# Altium PCB 2012_CARTE_FACTORISEE.PCBDOC
Units mil, origin at the board's own origin, x right, y up, seen from the top; angles counter-clockwise.
Board outline 2405 x 3151.5 mil, 4 copper layers (1-TOP, 2-SIGNAL, 3-GND, 4-BOTTOM); 121 components, 90 nets, 581 pads, 0 vias.
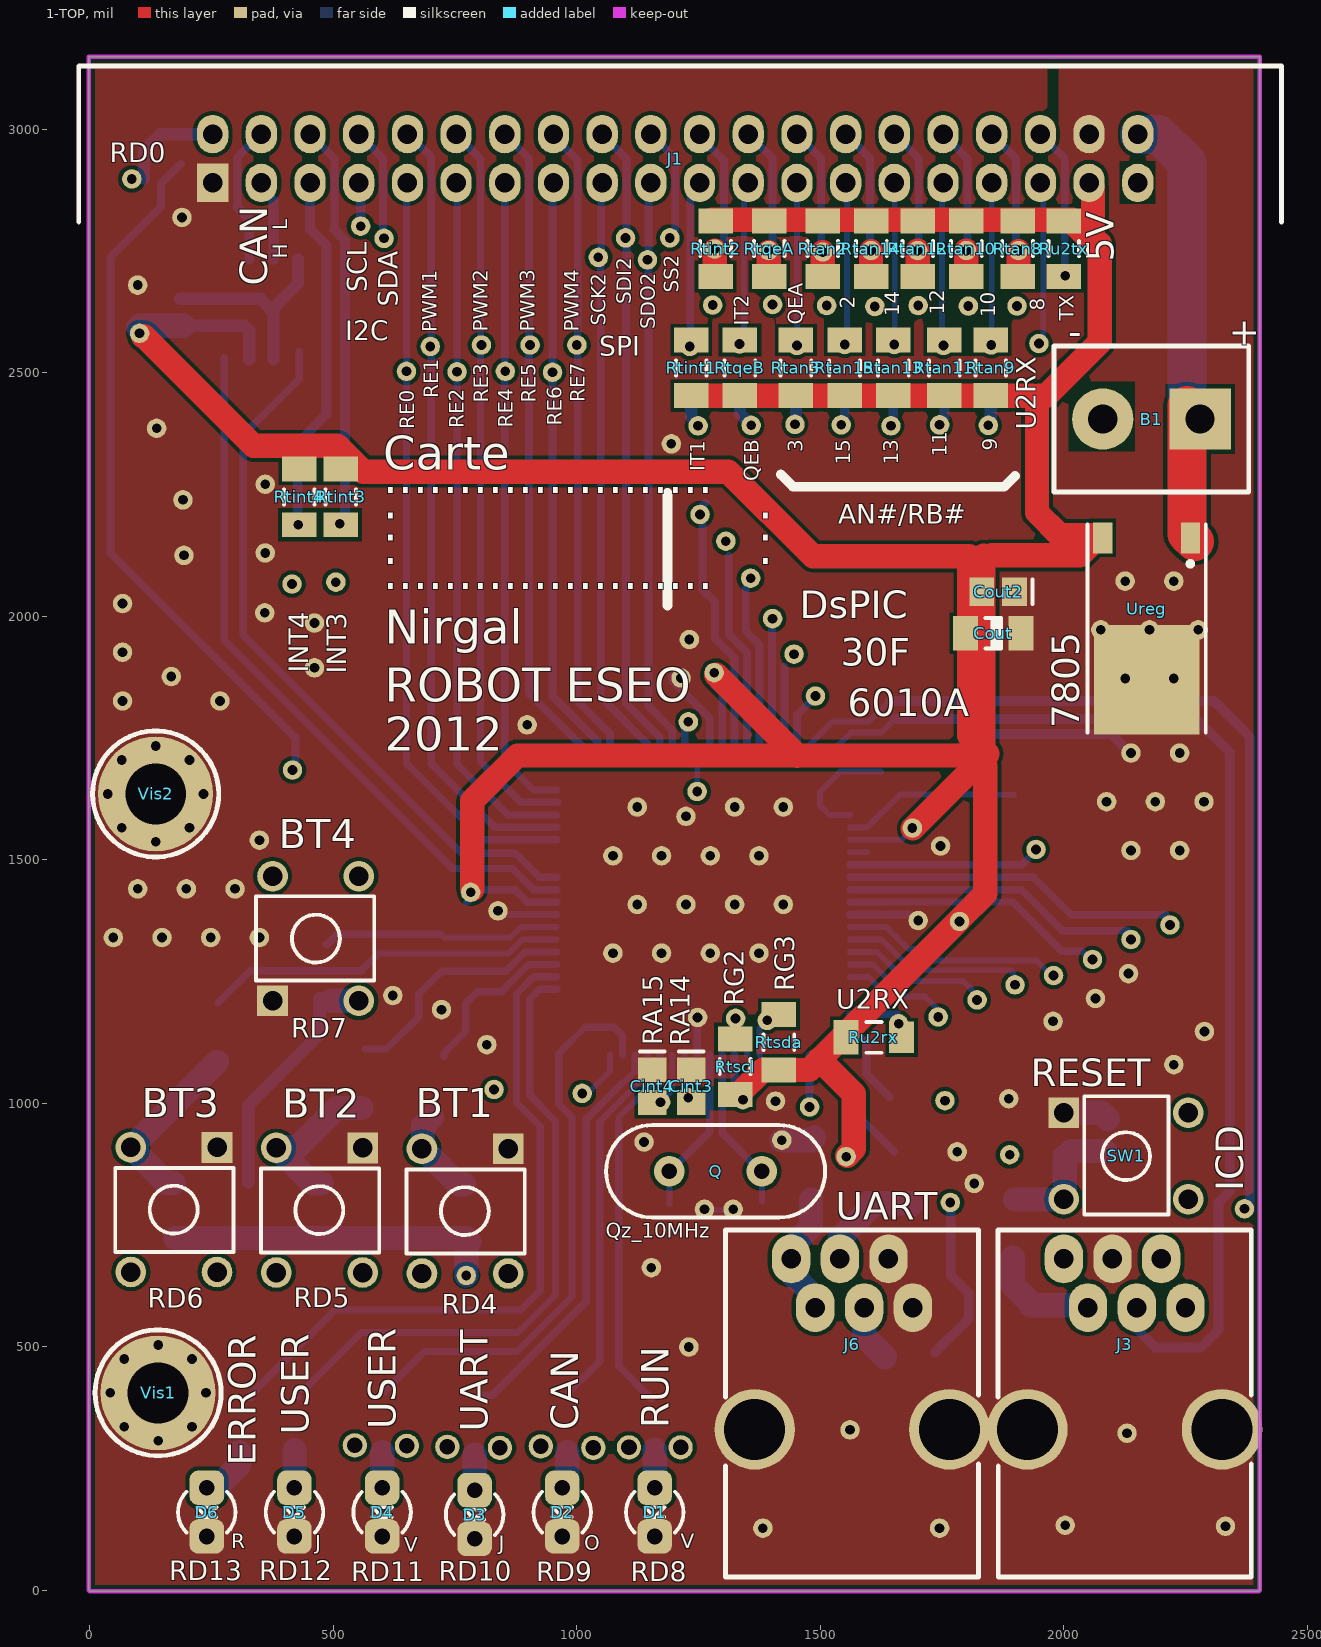
[diagram p0: 1-TOP view]
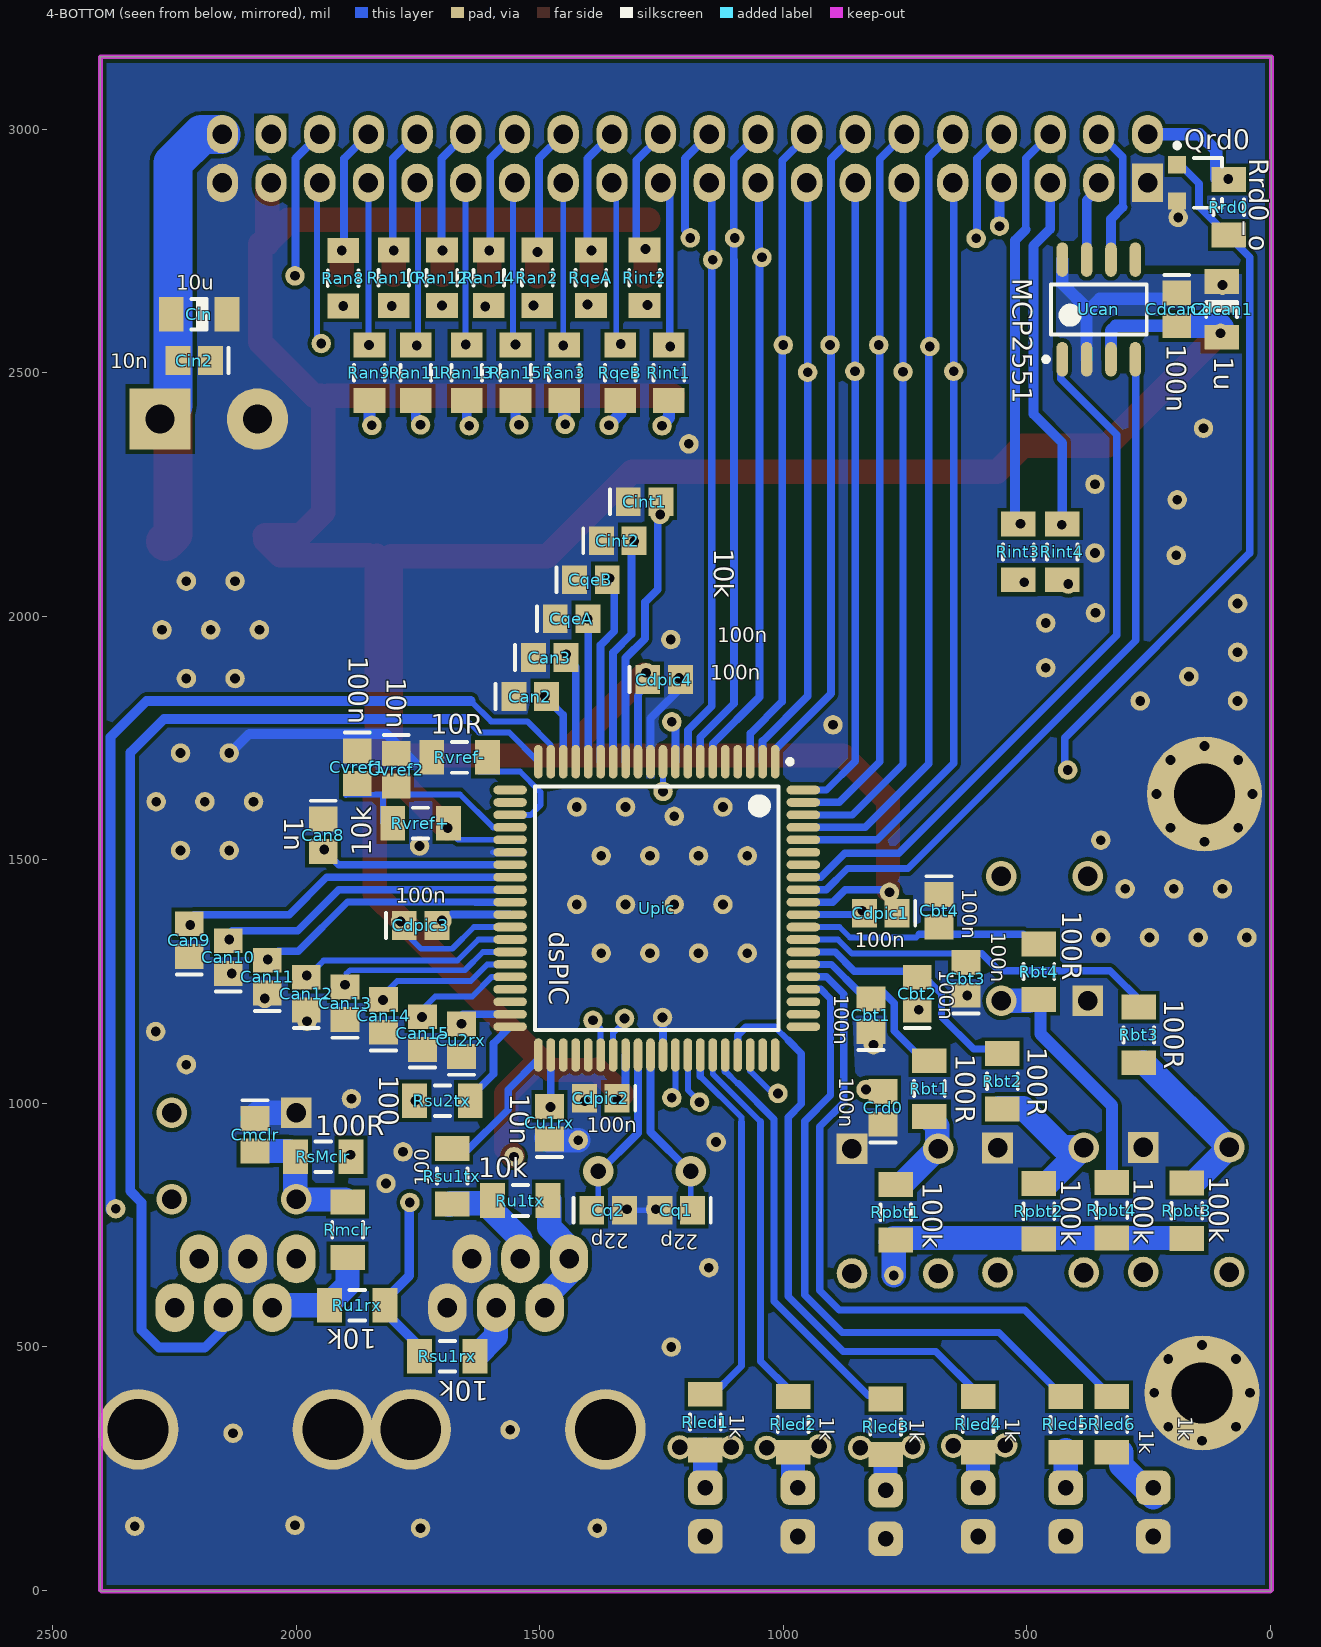
[diagram p1: 4-BOTTOM view, seen from below]
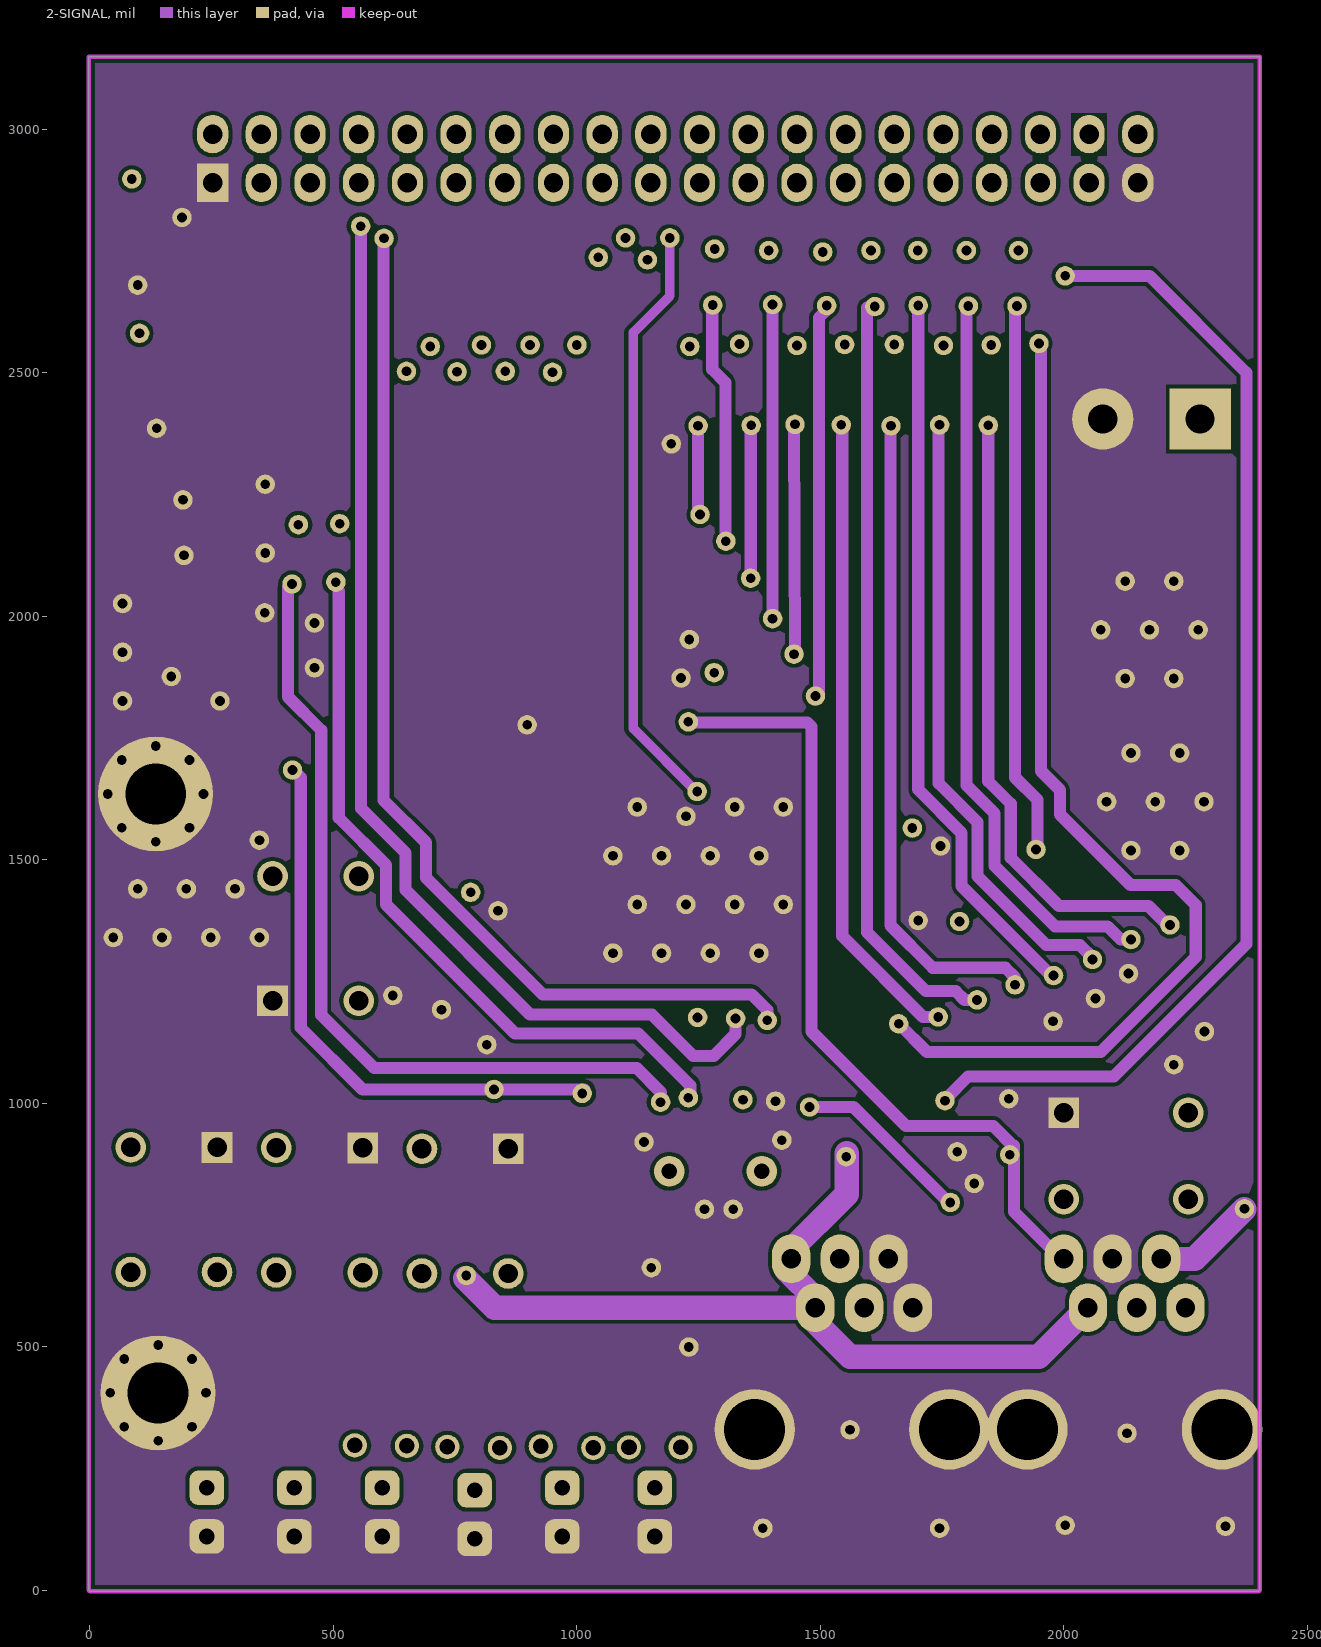
[diagram p2: 2-SIGNAL]
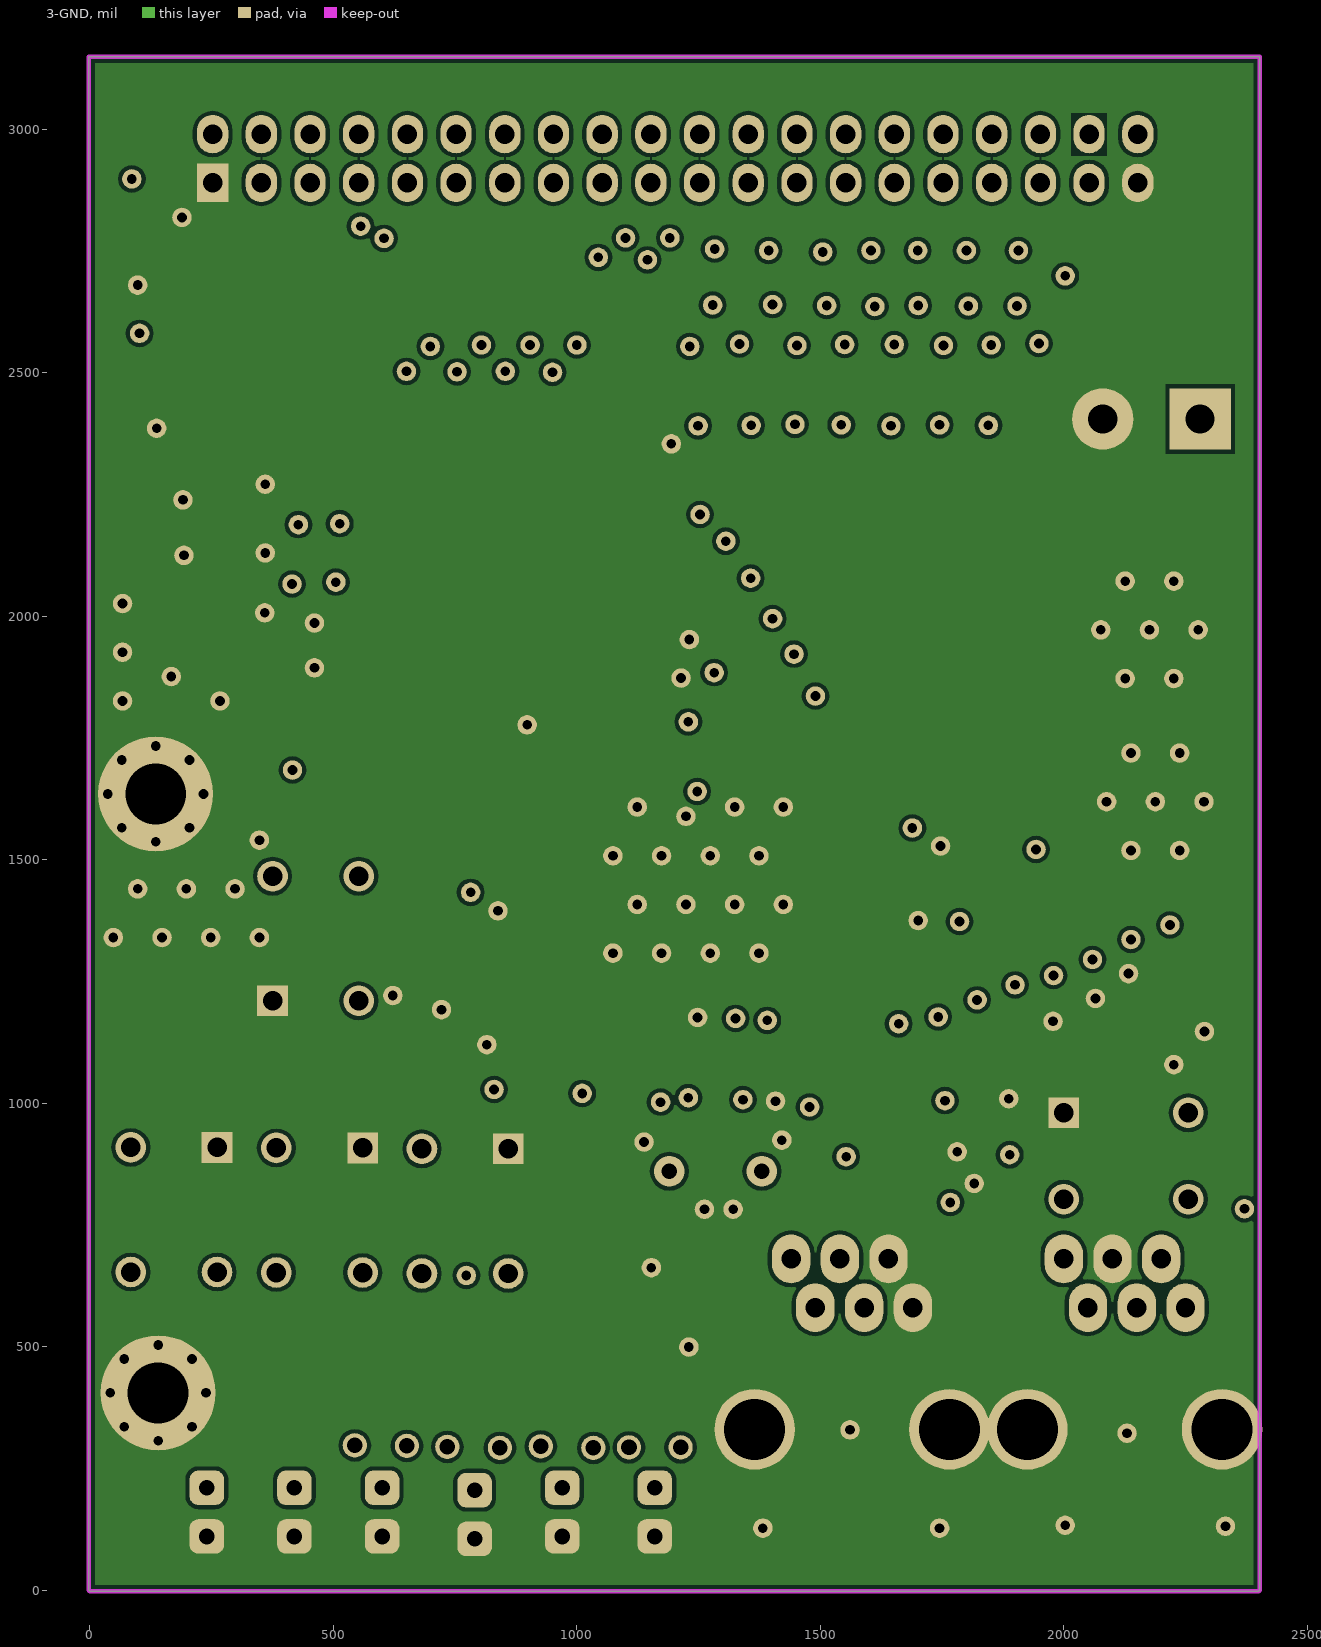
[diagram p3: 3-GND]
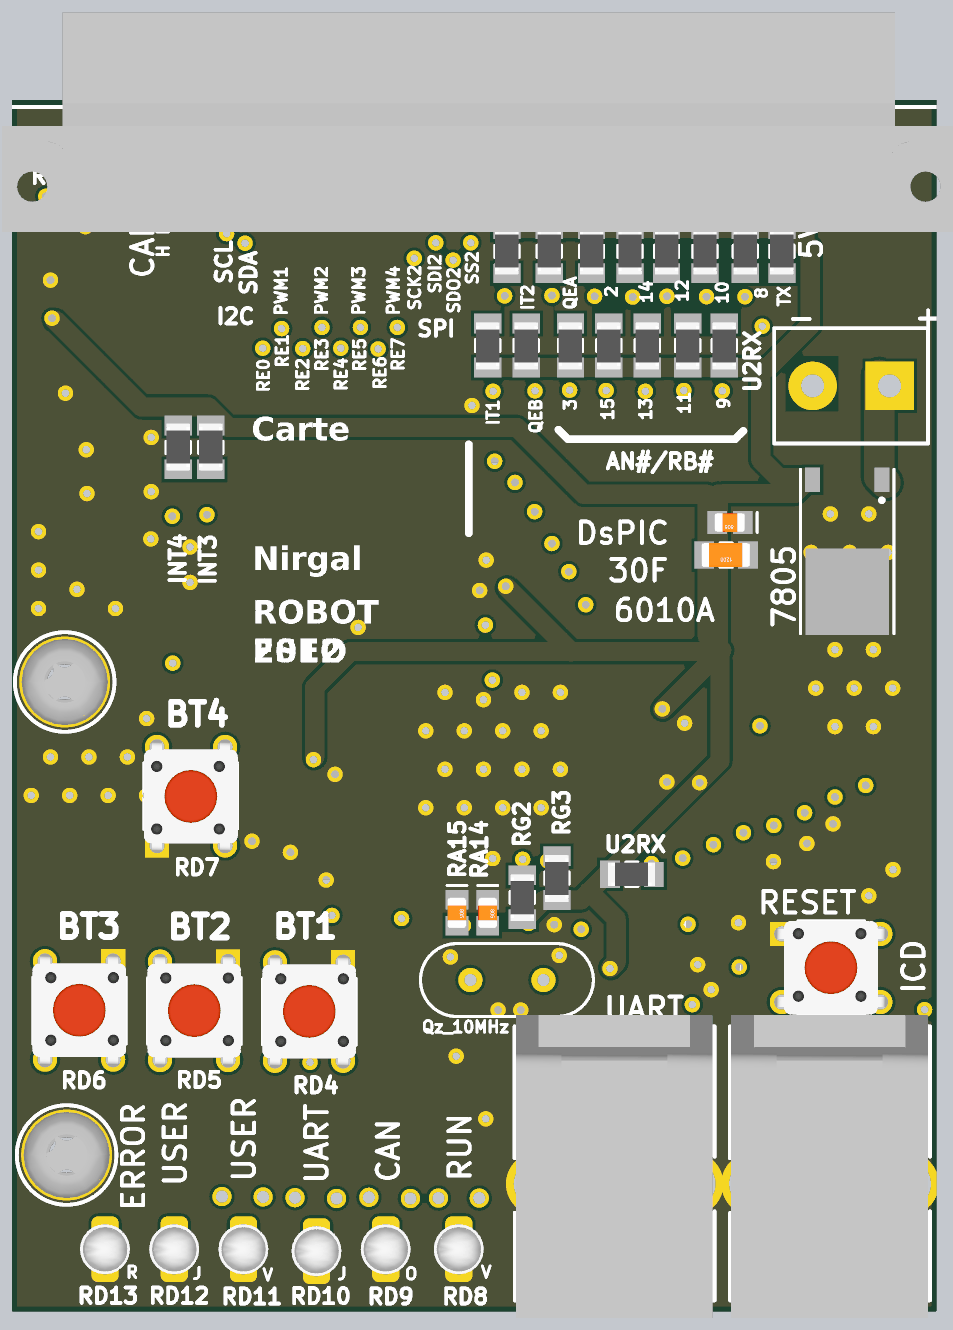
[diagram p4: 3D render of the assembled board from above, using the file's embedded part models]
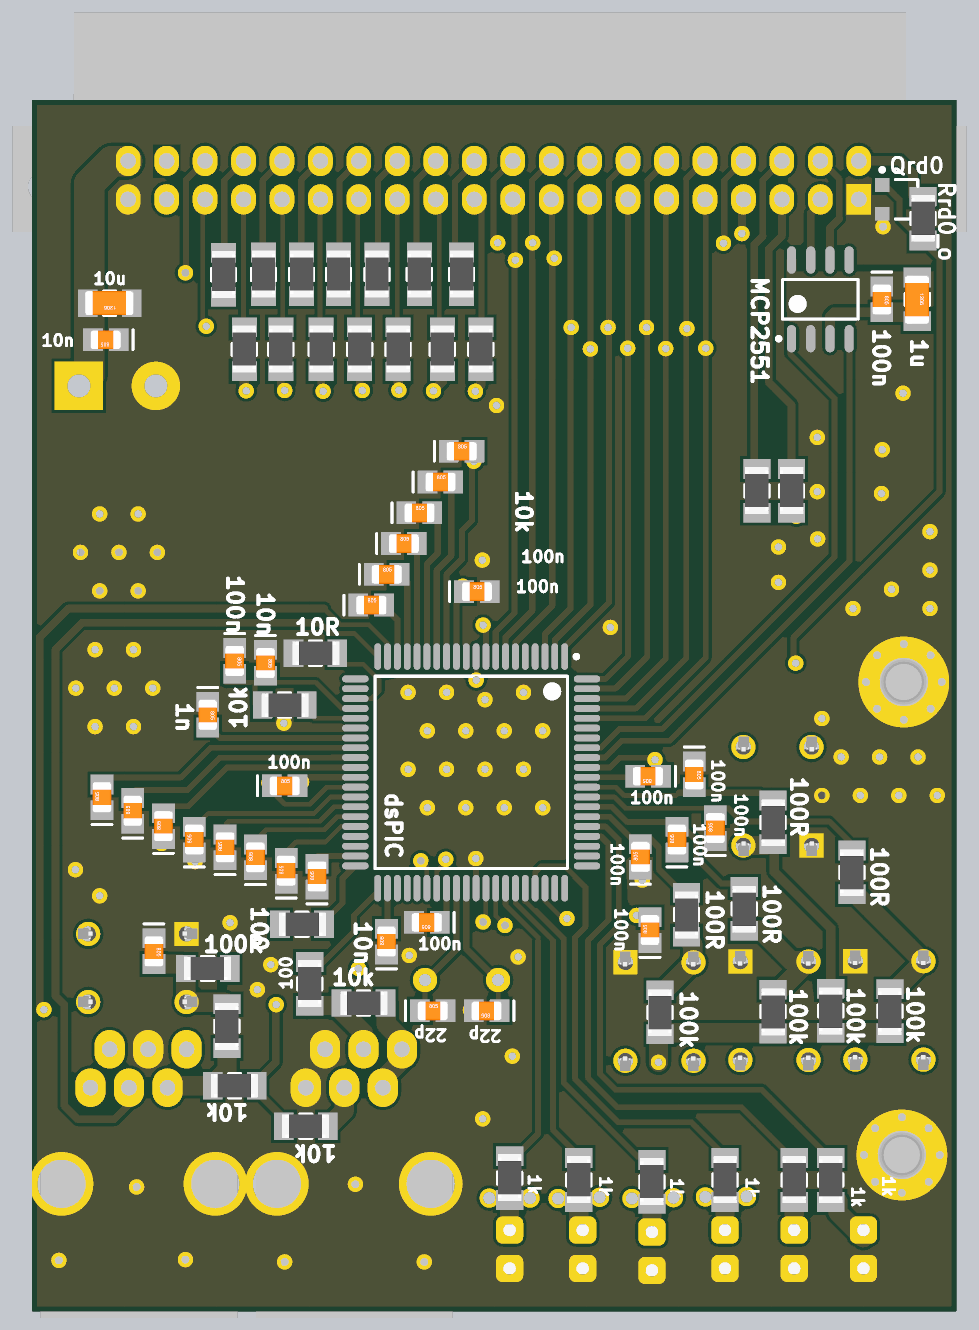
[diagram p5: 3D render of the assembled board from below, using the file's embedded part models]

## Layer stack, top to bottom
1-TOP: signal copper 1.4
Dielectric: prepreg 12.6, FR-4, Dk 4.8
2-SIGNAL: signal copper 1.4
Dielectric: core 12.6, FR-4, Dk 4.8
3-GND: signal copper 1.4
Dielectric: prepreg 12.6, FR-4, Dk 4.8
4-BOTTOM: signal copper 1.4

## Board outline
-2.5,0 0,-2.5 2400,-2.5 2402.5,0 2402.5,3149 -2.5,3149

## Design rules (kind name [scope] priority, off if disabled: settings)
Clearance Clearance_1 [InNamedPolygon('1-GND') Or  InNamedPolygon('4-GND') Or  InNamedPolygon('3-GND') Or  InNamedPolygon('2-GND')] p1: gap=8
Clearance [All] p2: gap=7
FabricationTestPointUsage TestPointUsage [All] p1: valid=0 allowmultiple=FALSE
FabricationTestpoint Testpoint [All] p1: side=3 testpointundercomponent=TRUE minsize=40 maxsize=100 preferedsize=60 minholesize=0 maxholesize=40 preferedholesize=32 testpointgrid=1 allowsidetop=TRUE allowsidebottom=TRUE usegrid=TRUE gridtolerance=0.01
PlaneClearance [All] p1: clearance=10
PlaneConnect [All] p1: planeconnectstyle=Direct reliefexpansion=25 reliefentries=4 reliefconductorwidth=12 reliefairgap=15
PolygonConnect [All] p1: connectstyle=Direct reliefconductorwidth=10 reliefentries=4 polygonreliefangle="90 Angle"
RoomDefinition 2012_Carte_Factorisee [InComponentClass('2012_Carte_Factorisee')] p1: confinementstyle=ConfineIn formatcopy=TRUE lockcomponents=FALSE outline -6448.4,-2900 -4448.4,-2900 -4448.4,-1900 -6448.4,-1900
RoutingLayers RoutingLayers_1 [All] p1: top layer_v5=TRUE mid layer 1_v5=FALSE mid layer 2_v5=FALSE bottom layer_v5=TRUE
RoutingLayers [All] p2: top layer_v5=TRUE mid layer 1_v5=FALSE mid layer 2_v5=FALSE bottom layer_v5=TRUE
RoutingVias [All] p1: holewidth=28 width=50 viastyle="Through Hole" minholewidth=28 minwidth=50 maxholewidth=28 maxwidth=50
SilkscreenOverComponentPads [All] p1: minsilkscreentomaskgap=10
SolderMaskExpansion [All] p1: expansion=0
Width [All] p1: maxlimit=150 minlimit=10 preferedwidth=15
22 further rules are at their usual default settings.

## Components (designator, comment, footprint, x,y, rotation, side; value= is the part's Value field where it differs from the comment)
B1 "ALIM" BORNIER2 2280,2405 r180 top
BT1 "SW_Pushbutton_6x6mm_Vertical" "Switch 6x6 Vertical" 859,906 r270 top
BT2 "SW_Pushbutton_6x6mm_Vertical" "Switch 6x6 Vertical" 560,908 r270 top
BT3 "SW_Pushbutton_6x6mm_Vertical" "Switch 6x6 Vertical" 261,909 r270 top
BT4 "SW_Pushbutton_6x6mm_Vertical" "Switch 6x6 Vertical" 375,1210 r90 top
Can2 "100nF" C0805_N 1520,1835 r180 bottom
Can3 "100nF" C0805_N 1480,1915 r180 bottom
Can8 "100nF" C0805_N 1945,1550 r270 bottom
Can9 "100nF" C0805_N 2220,1335 r90 bottom
Can10 "100nF" C0805_N 2140,1300 r90 bottom
Can11 "100nF" C0805_N 2060,1260 r90 bottom
Can12 "100nF" C0805_N 1980,1225 r90 bottom
Can13 "100nF" C0805_N 1900,1205 r90 bottom
Can14 "100nF" C0805_N 1821,1179 r90 bottom
Can15 "100nF" C0805_N 1741,1144 r90 bottom
Cbt1 "100nF" C0805_N 820,1180 r90 bottom
Cbt2 "100nF" C0805_N 725,1225 r90 bottom
Cbt3 "100nF" C0805_N 625,1255 r90 bottom
Cbt4 "100nF" C0805_N 680,1395 r270 bottom
Cdcan1 "1uF" C1206_N 100,2630 r270 bottom
Cdcan2 "100nF" C0805_N 192,2630 r270 bottom
Cdpic1 "100nF" C0805_N 800,1390 r0 bottom
Cdpic2 "100nF" C0805_N 1375,1010 r0 bottom
Cdpic3 "100nF" C0805_N 1745,1365 r180 bottom
Cdpic4 "100nF" C0805_N 1245,1870 r180 bottom
Cin "10uF" C1206_N 2200,2620 r0 bottom
Cin2 "10nF" C0805_N 2210,2525 r0 bottom
Cint1 "1nF" C0805_N 1285,2235 r180 bottom
Cint2 "1nF" C0805_N 1340,2155 r180 bottom
Cint3 "1nF" C0805_N 1235,1035 r270 top
Cint4 "1nF" C0805_N 1155,1035 r270 top
Cmclr "100nF" C0805_N 2085,935 r270 bottom
Cout "10uF" C1206_N 1855,1965 r180 top
Cout2 "100nF" C0805_N 1865,2050 r180 top
Cq1 "22pF" C0805_N 1220,780 r0 bottom
Cq2 "22pF" C0805_N 1360,780 r180 bottom
CqeA "1nF" C0805_N 1435,1995 r180 bottom
CqeB "1nF" C0805_N 1395,2075 r180 bottom
Crd0 "1nF" C0805_N 795,990 r90 bottom
Cu1rx "100pF" C0805_N 1480,960 r90 bottom
Cu2rx "100pF" C0805_N 1661,1129 r90 bottom
Cvref1 "100nF" C0805_N 1875,1690 r270 bottom
Cvref2 "10nF" C0805_N 1795,1685 r270 bottom
D1 "LED" LED_3mm 1160,160 r180 top
D2 "LED" LED_3mm 970,160 r180 top
D3 "LED" LED_3mm 790,155 r180 top
D4 "LED" LED_3mm 600,160 r180 top
D5 "LED" LED_3mm 420,160 r180 top
D6 "LED" LED_3mm 240,160 r180 top
J1 "Fond de Panier" HE10/40_FACTO 252,2890 r0 top
J3 "ICD" RJ11_6/6 2200,680 r270 top
J6 "UART" RJ11_6/6 1640,680 r270 top
Q "QU" QUARTZ_DROIT_BP 1380,860 r180 top
Qrd0 "" SOT23 145,2890 r270 bottom
Ran2 "100k" R1206_N#1 1505,2695 r90 bottom
Ran3 "100k" R1206_N#1 1450,2500 r90 bottom
Ran8 "100k" R1206_N#1 1904,2694 r90 bottom
Ran9 "100k" R1206_N#1 1850,2500 r90 bottom
Ran10 "100k" R1206_N#1 1800,2695 r90 bottom
Ran11 "100k" R1206_N#1 1755,2500 r90 bottom
Ran12 "100k" R1206_N#1 1701,2695 r90 bottom
Ran13 "100k" R1206_N#1 1650,2500 r90 bottom
Ran14 "100k" R1206_N#1 1605,2695 r90 bottom
Ran15 "100k" R1206_N#1 1550,2500 r90 bottom
Rbt1 "100k" R1206_N#2 700,1030 r270 bottom
Rbt2 "100k" R1206_N#2 550,1045 r270 bottom
Rbt3 "100k" R1206_N#2 270,1140 r270 bottom
Rbt4 "100k" R1206_N#2 475,1270 r270 bottom
Rint1 "10k" R1206_N#1 1235,2500 r90 bottom
Rint2 "10k" R1206_N#1 1285,2695 r90 bottom
Rint3 "100" R1206_N#2 517,2132 r90 bottom
Rint4 "100" R1206_N#2 427,2132 r90 bottom
Rled1 "1K" R1206_N#2 1160,345 r90 bottom
Rled2 "1K" R1206_N#2 980,340 r90 bottom
Rled3 "1K" R1206_N#2 790,335 r90 bottom
Rled4 "1K" R1206_N#2 600,340 r90 bottom
Rled5 "1K" R1206_N#2 420,340 r90 bottom
Rled6 "1K" R1206_N#2 325,340 r90 bottom
Rmclr "10k" R1206_N#2 1895,740 r270 bottom
Rpbt1 "100k" R1206_N#2 769,776 r270 bottom
Rpbt2 "100k" R1206_N#2 475,778 r270 bottom
Rpbt3 "100k" R1206_N#2 171,779 r270 bottom
Rpbt4 "100k" R1206_N#2 325,780 r270 bottom
RqeA "10k" R1206_N#1 1395,2695 r90 bottom
RqeB "10k" R1206_N#1 1335,2500 r90 bottom
Rrd0 "100" R1206_N#2 85,2840 r90 bottom
Rrd0_o "0" R1206_N#2 85,2840 r90 bottom
RsMclr "47" R1206_N#2 1945,890 r0 bottom
Rsu1rx "10k" R1206_N#2 1690,480 r0 bottom
Rsu1tx "100" R1206_N#2 1680,850 r90 bottom
Rsu2tx "100" R1206_N#2 1700,1005 r180 bottom
Rtan2 "10k" R1206_N#2 1505,2755 r90 top
Rtan3 "10k" R1206_N#2 1450,2510 r270 top
Rtan8 "10k" R1206_N#2 1905,2755 r90 top
Rtan9 "10k" R1206_N#2 1850,2510 r270 top
Rtan10 "10k" R1206_N#2 1800,2755 r90 top
Rtan11 "10k" R1206_N#2 1755,2510 r270 top
Rtan12 "10k" R1206_N#2 1700,2755 r90 top
Rtan13 "10k" R1206_N#2 1650,2510 r270 top
Rtan14 "10k" R1206_N#2 1605,2755 r90 top
Rtan15 "10k" R1206_N#2 1550,2510 r270 top
Rtint1 "10k" R1206_N#2 1235,2510 r270 top
Rtint2 "10k" R1206_N#2 1285,2755 r90 top
Rtint3 "10k" R1206_N#2 515,2245 r90 top
Rtint4 "10k" R1206_N#2 430,2245 r90 top
RtqeA "10k" R1206_N#2 1395,2755 r90 top
RtqeB "10k" R1206_N#2 1335,2510 r270 top
Rtscl "2.2k" R1206_N#2 1325,1075 r270 top
Rtsda "2.2k" R1206_N#2 1415,1125 r270 top
Ru1rx "10k" R1206_N#2 1875,585 r0 bottom
Ru1tx "10k" R1206_N#2 1540,800 r180 bottom
Ru2rx "10k" R1206_N#3 1610,1135 r180 top
Ru2tx "10k" R1206_N#2 2000,2755 r90 top
Rvref+ "10k" R1206_N#2 1745,1575 r180 bottom
Rvref- "10" R1206_N#2 1665,1710 r180 bottom
SW1 "SW_Pushbutton_6x6mm_Vertical" "Switch 6x6 Vertical" 2000,980 r0 top
Ucan "MCP2551" SOIC150-8_N 352,2630 r90 bottom
Upic "dsPIC30F6010A" TQFP80_N 1260,1400 r270 bottom
Ureg "MC7805BDTG" 369A-13 2170,2015 r180 top
Vis1 "Pad_M3" M3x6mm 140,405 r0 top
Vis2 "Pad_M3" M3x6mm 135,1635 r0 top

## Footprints (in the part's own frame and the unit in brackets; to place one, negate y for a bottom-side part, rotate by r counter-clockwise, add the part's x,y. Pads: shape width x height; smd on the part's side, far side on the other; paste and mask are expansions set on the pad)
369A-13 [mm] "D-PAK/TO-252-AA; 3 Leads (1 Cropped); Body 10.3 (inc. leads) x 6.7 mm (LxW max)"
  rect 1x1.6 smd: 1(-2.285,-3.7) 3(2.285,-3.7)
  rect 5.5x5.7 smd: 4(0,3.7)
  silkscreen extent -3.09,-4.4 3.09,6.45
BORNIER2 [mm] "Connector; Header; 2 Position; screw terminal blocks, Pin Spacing=5.08mm"
  rect 3.2x3.2 hole 1.524: 1(0,0)
  round 3.2 hole 1.524: 2(5.08,0)
  silkscreen extent -2.54,-3.81 7.62,3.81, body extent -2.67,-3.94 7.75,3.94, height 10
C0805_N [mm] "Chip Capacitor, Body 2.0x1.3mm, IPC Medium Density"
  rect 1.3x1.5 smd: 1(-0.85,0) 2(0.85,0)
  silkscreen extent -1.8,-0.65 -1.8,0.65, body extent -0.99,-0.63 1.01,0.63, height 0.8
C1206_N [mm] "Chip Capacitor, Body 3.2x1.6mm, IPC Medium Density"
  rect 1.3x1.8 smd: 1(-1.45,0) 2(1.45,0)
  silkscreen extent -0.4,-0.8 0.4,0.8, body extent -1.57,-0.81 1.63,0.79, height 1.02
HE10/40_FACTO [mm] "Connector; HE10; 40 Position; Male; Right Angle; Pin Spacing=2.54mm"
  rect 1.63x2 hole 1.016: 1(0,0)
  oval 1.63x2 hole 1.016: 2(0,2.54) 3(2.54,0) 4(2.54,2.54) 5(5.08,0) 6(5.08,2.54) 7(7.62,0) 8(7.62,2.54) 9(10.16,0) 10(10.16,2.54) 11(12.7,0) 12(12.7,2.54) 13(15.24,0) 14(15.24,2.54) 15(17.78,0) 16(17.78,2.54) 17(20.32,0) 18(20.32,2.54) 19(22.86,0) 20(22.86,2.54) 21(25.4,0) 22(25.4,2.54) 23(27.94,0) 24(27.94,2.54) 25(30.48,0) 26(30.48,2.54) 27(33.02,0) 28(33.02,2.54) 29(35.56,0) 30(35.56,2.54) 31(38.1,0) 32(38.1,2.54) 33(40.64,0) 34(40.64,2.54) 35(43.18,0) 36(43.18,2.54) 37(45.72,0) 38(45.72,2.54) 39(48.26,0) 40(48.26,2.54)
  silkscreen extent -6.98,-2.03 55.75,6.1, body extent -7.12,-2.16 55.88,12.34, height 8.5
LED_3mm [mm] "LED 3mm; 2 Leads"
  rrect50% 1.8x1.8 hole 0.813: 1(0,-1.27) 2(0,1.27)
  silkscreen extent -1.5,-1.06 1.5,1.06, body extent -1.64,-1.65 1.65,1.65, height 5.51
M3x6mm [mm] "Vis M3 X 6mm _TORX_Tête 6mm"
  round 0.8 hole 0.508: 1(-2.5,0) 1(-1.768,-1.768) 1(-1.768,1.768) 1(0,-2.5) 1(0,2.5) 1(1.768,-1.768) 1(1.768,1.768) 1(2.5,0)
  round 6 hole 3.175: 1(0,0)
  silkscreen extent -3.29,-3.28 3.29,3.28, body extent -2.84,-2.85 2.86,2.85, height 1.67
QUARTZ_DROIT_BP [mil] "LOW PROFILE CRYSTALS; SERIES AS (HC-49/S); 11.43 mm x 4.82 mm; Pin Spacing=4.82 mm"
  round 63 hole 32: 1(0,0) 2(190,0)
  silkscreen extent -130,-95 320,95
R1206_N#1 [mm] "Chip Resistor, Body 3.2x1.6mm, IPC Medium Density"
  rect 1.3x1.651 smd: 1(-1.45,0) 2(1.45,0)
  silkscreen extent -0.4,-0.8 0.4,0.8, body extent -1.68,-0.87 1.68,0.87, height 0.71
R1206_N#2 [mm] "Chip Resistor, Body 3.2x1.6mm, IPC Medium Density"
  rect 1.3x1.8 smd: 1(-1.45,0) 2(1.45,0)
  silkscreen extent -0.4,-0.8 0.4,0.8, body extent -1.68,-0.87 1.68,0.87, height 0.71
R1206_N#3 [mm] "Chip Resistor, Body 3.2x1.6mm, IPC Medium Density"
  rect 1.3x1.651 smd: 1(-1.45,0)
  rect 1.3x1.8 smd: 2(1.45,0)
  silkscreen extent -0.4,-0.8 0.4,0.8, body extent -1.68,-0.87 1.68,0.87, height 0.71
RJ11_6/6 [mm] "Connector; RJ11; 6P/6C; Low Profil; Right Angle; Pin Spacing=2.54mm"
  oval 2.54x2 hole 1.016: 1(0,-5.08) 2(2.54,-3.82) 3(0,-2.54) 4(2.54,-1.27) 5(0,0) 6(2.54,1.27)
  round 4.2 hole 3.175: FIX1(8.89,3.18) FIX2(8.89,-6.98)
  silkscreen extent -1.51,-8.51 16.59,4.7, body extent -2.25,-8.43 17.75,4.57, height 16
SOIC150-8_N [mm] "SOIC, 8-Leads, Body 4.9x3.8mm, Pitch 1.27mm, IPC Medium Density"
  oval 1.8x0.6 smd: 1(-2.6,1.905) 2(-2.6,0.635) 3(-2.6,-0.635) 4(-2.6,-1.905) 5(2.6,-1.905) 6(2.6,-0.635) 7(2.6,0.635) 8(2.6,1.905)
  silkscreen extent -2.72,-2.5 1.3,2.88, body extent -2,-2.5 2,2.5, height 1.76
SOT23 [mm] "SOT-23; 3 Leads; Body 3.0 x 2.5 mm, inc. leads (LxW max)"
  rect 0.9x0.95 smd: 1(-0.95,-1.175) 2(0.95,-1.175) 3(0,1.175)
  silkscreen extent -2.07,-1.3 1.3,1.18
"Switch 6x6 Vertical" [mm]
  rect 1.6x1.6 hole 1.016: 1(0,0)
  round 1.6 hole 1.016: 2(6.5,0) 3(0,-4.5) 4(6.5,-4.5)
  silkscreen extent 1.07,-5.31 5.46,0.86, body extent -0.71,-5.34 7.19,0.86, height 7
TQFP80_N [mm] "80-Pin Thin Plastic Quad Flat Pack 0.65 mm Pitch, IPC Medium Density"
  oval 1.75x0.45 smd: 1(-7.65,6.175) 2(-7.65,5.525) 3(-7.65,4.875) 4(-7.65,4.225) 5(-7.65,3.575) 6(-7.65,2.925) 7(-7.65,2.275) 8(-7.65,1.625) 9(-7.65,0.975) 10(-7.65,0.325) 11(-7.65,-0.325) 12(-7.65,-0.975) 13(-7.65,-1.625) 14(-7.65,-2.275) 15(-7.65,-2.925) 16(-7.65,-3.575) 17(-7.65,-4.225) 18(-7.65,-4.875) 19(-7.65,-5.525) 20(-7.65,-6.175) 41(7.65,-6.175) 42(7.65,-5.525) 43(7.65,-4.875) 44(7.65,-4.225) 45(7.65,-3.575) 46(7.65,-2.925) 47(7.65,-2.275) 48(7.65,-1.625) 49(7.65,-0.975) 50(7.65,-0.325) 51(7.65,0.325) 52(7.65,0.975) 53(7.65,1.625) 54(7.65,2.275) 55(7.65,2.925) 56(7.65,3.575) 57(7.65,4.225) 58(7.65,4.875) 59(7.65,5.525) 60(7.65,6.175)
  oval 0.45x1.75 smd: 21(-6.175,-7.65) 22(-5.525,-7.65) 23(-4.875,-7.65) 24(-4.225,-7.65) 25(-3.575,-7.65) 26(-2.925,-7.65) 27(-2.275,-7.65) 28(-1.625,-7.65) 29(-0.975,-7.65) 30(-0.325,-7.65) 31(0.325,-7.65) 32(0.975,-7.65) 33(1.625,-7.65) 34(2.275,-7.65) 35(2.925,-7.65) 36(3.575,-7.65) 37(4.225,-7.65) 38(4.875,-7.65) 39(5.525,-7.65) 40(6.175,-7.65) 61(6.175,7.65) 62(5.525,7.65) 63(4.875,7.65) 64(4.225,7.65) 65(3.575,7.65) 66(2.925,7.65) 67(2.275,7.65) 68(1.625,7.65) 69(0.975,7.65) 70(0.325,7.65) 71(-0.325,7.65) 72(-0.975,7.65) 73(-1.625,7.65) 74(-2.275,7.65) 75(-2.925,7.65) 76(-3.575,7.65) 77(-4.225,7.65) 78(-4.875,7.65) 79(-5.525,7.65) 80(-6.175,7.65)
  silkscreen extent -7.77,-6.35 6.35,7.07, body extent -7,-7 7,7, height 1.6

## Part data
B1: library part BORNIER2
BT1 BT2 BT3 BT4 SW1: "Switch tactil 6mm x 6mm Vertical"
Can2 Can3 Can8 Can9 Can10 Can11 Can12 Can13 Can14 Can15 Cbt1 Cbt2 Cbt3 Cbt4 Cdcan1 Cdcan2 Cdpic1 Cdpic2 Cdpic3 Cdpic4 Cin Cin2 Cint1 Cint2 Cint3 Cint4 Cmclr Cout Cout2 Cq1 Cq2 CqeA CqeB Crd0 Cu1rx Cu2rx Cvref1 Cvref2: library part Capacitor, "Capacitor"
D1 D2 D3 D4 D5 D6: "Typical LED"
J1: library part CONNECTEUR_HE10_40
J3 J6: library part CONNECTEUR_RJ12
Q: library part QUARTZ_DROIT_BAS_PROFIL, "Crystal Oscillator"
Qrd0: library part FDP100N10, "MOSFET N-CH"
Ran2 Ran3 Ran8 Ran9 Ran10 Ran11 Ran12 Ran13 Ran14 Ran15 Rbt1 Rbt2 Rbt3 Rbt4 Rint1 Rint2 Rint3 Rint4 Rled1 Rled2 Rled3 Rled4 Rled5 Rled6 Rmclr Rpbt1 Rpbt2 Rpbt3 Rpbt4 RqeA RqeB Rrd0 Rrd0_o RsMclr Rsu1rx Rsu1tx Rsu2tx Rtan2 Rtan3 Rtan8 Rtan9 Rtan10 Rtan11 Rtan12 Rtan13 Rtan14 Rtan15 Rtint1 Rtint2 Rtint3 Rtint4 RtqeA RtqeB Rtscl Rtsda Ru1rx Ru1tx Ru2rx Ru2tx Rvref+ Rvref-: library part Resistor, "Resistor"
Ucan: "High Speed Can Transceiver"
Upic: "High-Performance, 16-bit Digital Signal Controllers"
Ureg: library part MC7805ACD2T, "Three-Terminal Positive Voltage Regulator"
Vis1 Vis2: library part "Vis M3 X 6mm _TORX_Tête 6mm", "Vis M3 X 6mm _TORX_Tête 6mm"

## Free pads (board coordinates)
  round 40 hole 20: 0(48,1340) 0(67,1826) 0(67,1926) 0(67,2026) 0(86,2898) 0(98,1440) 0(98,2680) 0(102,2581) 0(137,2386) 0(148,1340) 0(167,1876) 0(189,2819) 0(191,2239) 0(193,2125) 0(198,1440) 0(248,1340) 0(267,1826) 0(298,1440) 0(348,1340) 0(348,1540) 0(359,2007) 0(360,2130) 0(360,2271) 0(415,2066) 0(416,1684) 0(428,2188) 0(461,1894) 0(461,1986) 0(505,2070) 0(513,2190) 0(556,2801) 0(604,2776) 0(622,1221) 0(650,2503) 0(699,2554) 0(722,1192) 0(754,2502) 0(773,646) 0(782,1433) 0(804,2557) 0(815,1120) 0(830,1028) 0(838,1395) 0(853,2503) 0(898,1777) 0(904,2557) 0(950,2501) 0(1000,2557) 0(1011,1020) 0(1044,2737) 0(1074,1308) 0(1074,1508) 0(1100,2777) 0(1124,1408) 0(1124,1608) 0(1138,920) 0(1145,2732) 0(1153,662) 0(1172,1002) 0(1174,1308) 0(1174,1508) 0(1191,2777) 0(1194,2354) 0(1214,1873) 0(1224,1408) 0(1224,1589) 0(1229,1011) 0(1229,1783) 0(1230,499) 0(1231,1952) 0(1232,2554) 0(1247,1640) 0(1248,1176) 0(1249,2391) 0(1253,2209) 0(1262,782) 0(1274,1308) 0(1274,1508) 0(1279,2639) 0(1282,1884) 0(1283,2754) 0(1306,2154) 0(1321,782) 0(1324,1408) 0(1324,1608) 0(1326,1174) 0(1334,2559) 0(1341,1007) 0(1357,2078) 0(1358,2392) 0(1374,1308) 0(1374,1508) 0(1382,127) 0(1391,1170) 0(1394,2751) 0(1402,1995) 0(1402,2640) 0(1408,1004) 0(1421,924) 0(1424,1408) 0(1424,1608) 0(1446,1922) 0(1448,2394) 0(1452,2556) 0(1478,992) 0(1490,1836) 0(1505,2748) 0(1513,2638) 0(1543,2393) 0(1550,2558) 0(1553,890) 0(1561,329) 0(1604,2751) 0(1612,2636) 0(1645,2391) 0(1652,2558) 0(1661,1163) 0(1689,1565) 0(1700,2751) 0(1701,1375) 0(1701,2638) 0(1742,1177) 0(1745,127) 0(1745,2393) 0(1747,1528) 0(1753,2556) 0(1756,1005) 0(1767,796) 0(1781,900) 0(1786,1373) 0(1800,2751) 0(1804,2637) 0(1816,835) 0(1822,1212) 0(1845,2392) 0(1851,2557) 0(1887,1009) 0(1889,894) 0(1900,1243) 0(1904,2637) 0(1907,2751) 0(1943,1521) 0(1949,2560) 0(1978,1168) 0(1979,1262) 0(2003,133) 0(2003,2699) 0(2059,1295) 0(2065,1215) 0(2076,1972) 0(2088,1619) 0(2126,1872) 0(2126,2072) 0(2130,322) 0(2133,1266) 0(2138,1336) 0(2138,1519) 0(2138,1719) 0(2176,1972) 0(2188,1619) 0(2218,1366) 0(2226,1079) 0(2226,1872) 0(2226,2072) 0(2238,1519) 0(2238,1719) 0(2276,1972) 0(2288,1619) 0(2289,1147) 0(2332,131) 0(2371,783)
  round 50 hole 32: 0(651,296) 0(842,292) 0(1034,292) 0(1213,293) 1(544,297) 1(734,294) 1(926,295) 1(1107,293)

## Nets (pads, with @x,y where several pads share a name; then routed paths per layer and width w, separated by ;. In a path a pad name is that pad's centre, name@x,y a point inside that pad or via, vN(x,y) a via of type N, cw(c..) or ccw(c..) an arc to the next point about the centre after c; other vN are vias at no path point)
AN2: J1.26 pad.0@1505,2748 Ran2.2 Rtan2.1 | length 310.6
  1-TOP w50: Rtan2.1 pad.0@1505,2748
  4-BOTTOM w16: J1.26 1502,2940 1502,2753 Ran2.2@1500,2751
AN3: J1.25 pad.0@1452,2556 Ran3.2 Rtan3.1 | length 338
  4-BOTTOM w12: Ran3.2@1452,2552 J1.25
AN4_QEA: J1.24 pad.0@1394,2751 RqeA.2 RtqeA.1 | length 311.2
  1-TOP w50: RtqeA.1@1394,2697.91 pad.0@1394,2748
  4-BOTTOM w16: J1.24 1402,2940 1402,2751 RqeA.2@1401,2750
AN5_QEB: J1.23 pad.0@1334,2559 RqeB.2 RtqeB.1 | length 329
  4-BOTTOM w12: RqeB.2@1343,2561 J1.23@1343,2890
AN8: J1.34 pad.0@1907,2751 Ran8.2 Rtan8.1 | length 309.2
  1-TOP w50: Rtan8.1@1907,2699.91 pad.0@1907,2750
  4-BOTTOM w16: J1.34 1902,2940 1902,2753 Ran8.2@1901,2752
AN9: J1.33 pad.0@1851,2557 Ran9.2 Rtan9.1 | length 335
  4-BOTTOM w12: Ran9.2@1852,2555 J1.33
AN10: J1.32 pad.0@1800,2751 Ran10.2 Rtan10.1 | length 307.8
  1-TOP w50: Rtan10.1@1800,2700.91 pad.0@1800,2751
  4-BOTTOM w16: J1.32 1802,2940 Ran10.2@1802,2753
AN11: J1.31 pad.0@1753,2556 Ran11.2 Rtan11.1 | length 330
  4-BOTTOM w12: Ran11.2@1750,2559 J1.31@1750,2889
AN12: J1.30 pad.0@1700,2751 Ran12.2 Rtan12.1 | length 311.2
  1-TOP w50: Rtan12.1@1700,2700.91 pad.0@1700,2751
  4-BOTTOM w16: J1.30 1702,2940 1702,2751 Ran12.2@1703,2750
AN13: J1.29 pad.0@1652,2558 Ran13.2 Rtan13.1 | length 335
  4-BOTTOM w12: Ran13.2@1653,2555 J1.29@1653,2890
AN14: J1.28 pad.0@1604,2751 Ran14.2 Rtan14.1 | length 306.9
  1-TOP w50: Rtan14.1@1604,2699.91 pad.0@1604,2750
  4-BOTTOM w16: J1.28 1602,2940 1602,2761 Ran14.2@1597,2756
AN15: J1.27 pad.0@1550,2558 Ran15.2 Rtan15.1 | length 324
  4-BOTTOM w12: Ran15.2@1555,2566 J1.27@1555,2890
BT1: BT1.3 Rbt1.2 Rpbt1.1 | length 187.8
  4-BOTTOM w50: Rbt1.2@702.12,971.09 684,952.97 684,906 756.91,833.09 Rpbt1.1
BT2: BT2.3 Rbt2.2 Rpbt2.1 | length 326.5
  4-BOTTOM w50: BT2.3 384.83,910 427,910 507,990 Rbt2.2@557,990 ; BT2.3@386,906 456.91,835.09 Rpbt2.1
BT3: BT3.3 Rbt3.2 Rpbt3.1 | length 366.3
  4-BOTTOM w50: BT3.3 83.92,909.08 156.91,836.09 Rpbt3.1 ; BT3.3@84.5,908.5 Rbt3.2@260.5,1084.5
BT4: BT4.3 Rbt4.2 Rpbt4.1 | length 499.8
  4-BOTTOM w25: Rpbt4.1 325,995 472,1142 Rbt4.2@472,1216
  4-BOTTOM w50: Rbt4.2@496,1210 BT4.3 BT4.3@556,1210
C1RX: Ucan.4 Upic.72 | length 1475.7
  4-BOTTOM w15: Ucan.4@276,2531 276,1950 744,1482 868,1482 911.61,1438.39 Upic.72
C1TX: Ucan.1 Upic.73 | length 1479.3
  4-BOTTOM w15: Ucan.1@430,2543 430,2488 315,2373 315,1961 763,1513 874,1513 923.02,1463.98 Upic.73
CAN_H: J1.3 Ucan.7 | length 166.9
  4-BOTTOM w20: J1.3@345,2886 377,2854 Ucan.7
CAN_L: J1.4 Ucan.6 | length 282.8
  4-BOTTOM w16: 303,2840 303,2943 J1.4@347,2987
  4-BOTTOM w20: 303,2840 327,2816 Ucan.6
GND: B1.2 BT1.1 BT2.1 BT3.1 BT4.1 Can2.1 Can3.1 Can8.1 Can9.1 Can10.1 Can11.1 Can12.1 Can13.1 Can14.1 Can15.1 Cbt1.1 Cbt2.1 Cbt3.1 Cbt4.1 Cdcan1.1 Cdcan2.1 Cdpic1.2 Cdpic2.2 Cdpic3.2 Cdpic4.2 Cin2.1 Cin.1 Cint1.1 Cint2.1 Cint3.1 Cint4.1 Cmclr.1 Cout2.1 Cout.1 Cq1.2 Cq2.2 CqeA.1 CqeB.1 Crd0.1 Cu1rx.1 Cu2rx.1 Cvref1.1 Cvref2.1 D1.2 D2.2 D3.2 D4.2 D5.2 D6.2 J1.1 J1.38 J1.39 J3.3 J3.FIX1 J3.FIX2 J6.5 J6.6 J6.FIX1 J6.FIX2 pad.0@48,1340 pad.0@67,1826 pad.0@67,1926 pad.0@67,2026 pad.0@98,1440 pad.0@98,2680 pad.0@137,2386 pad.0@148,1340 pad.0@167,1876 pad.0@189,2819 pad.0@191,2239 pad.0@193,2125 pad.0@198,1440 pad.0@248,1340 pad.0@267,1826 pad.0@298,1440 pad.0@348,1340 pad.0@348,1540 pad.0@359,2007 pad.0@360,2130 pad.0@360,2271 pad.0@461,1894 pad.0@461,1986 pad.0@622,1221 pad.0@722,1192 pad.0@815,1120 pad.0@838,1395 pad.0@898,1777 pad.0@1074,1308 pad.0@1074,1508 pad.0@1124,1408 pad.0@1124,1608 pad.0@1138,920 pad.0@1153,662 pad.0@1174,1308 pad.0@1174,1508 pad.0@1194,2354 pad.0@1214,1873 pad.0@1224,1408 pad.0@1224,1589 pad.0@1230,499 pad.0@1231,1952 pad.0@1248,1176 pad.0@1262,782 pad.0@1274,1308 pad.0@1274,1508 pad.0@1321,782 pad.0@1324,1408 pad.0@1324,1608 pad.0@1374,1308 pad.0@1374,1508 pad.0@1382,127 pad.0@1408,1004 pad.0@1421,924 pad.0@1424,1408 pad.0@1424,1608 pad.0@1561,329 pad.0@1701,1375 pad.0@1745,127 pad.0@1747,1528 pad.0@1781,900 pad.0@1816,835 pad.0@1887,1009 pad.0@1978,1168 pad.0@2003,133 pad.0@2065,1215 pad.0@2076,1972 pad.0@2088,1619 pad.0@2126,1872 pad.0@2126,2072 pad.0@2130,322 pad.0@2133,1266 pad.0@2138,1519 pad.0@2138,1719 pad.0@2176,1972 pad.0@2188,1619 pad.0@2226,1079 pad.0@2226,1872 pad.0@2226,2072 pad.0@2238,1519 pad.0@2238,1719 pad.0@2276,1972 pad.0@2288,1619 pad.0@2289,1147 pad.0@2332,131 Qrd0.2 Rvref-.1 SW1.1 Ucan.2 Ucan.8 Upic.11 Upic.26 Upic.31 Upic.51 Upic.70 Ureg.4 Vis1.1 Vis2.1 | length 1631.1
  4-BOTTOM w12: pad.0@1246,1176 pad.0@1247.2,1174.8 ; Cq1.2 Cq2.2@1319,780 ; Upic.26 1596.16,1515.16 ; 1680.2,1387.2 1681,1388
  4-BOTTOM w15: Cdpic1.2@842.8,1387.2 Upic.70
  4-BOTTOM w16: Cdpic4.2@1196.54,1876.46 1196.54,1866.46 1272.8,1790.2 Upic.11 ; Upic.51 pad.0@1247.2,1174.8 ; Upic.31 1680.2,1387.2
  4-BOTTOM w20: 1757.09,1700 1815.09,1758 2097,1758 pad.0@2136,1719
  4-BOTTOM w25: Cdcan2.1@185,2652 350,2652 373,2629 ; 372,2628 373,2629 ; Ucan.2 377,2625 373,2629 ; Ucan.8 427,2683 373,2629
  4-BOTTOM w50: pad.0@1421,924 1482,924 Cu1rx.1@1487,929 ; SW1.1 2078,980 Cmclr.1@2090,968
LED1: Rled1.2 Upic.54 | length 768.5
  4-BOTTOM w12: 1086,961 1086,971 1170.43,1055.43
  4-BOTTOM w15: 1086,961 1086,460 Rled1.2@1153,393 ; 1170.43,1055.43 Upic.54
LED2: Rled2.2 Upic.55 | length 758.4
  4-BOTTOM w12: 1047,962 1144.84,1059.84 Upic.55
  4-BOTTOM w15: Rled2.2@984,407 1047,470 1047,962
LED3: Rled3.2 Upic.56 | length 842.5
  4-BOTTOM w12: 1092.19,1040.19 1094.19,1040.19 Upic.56@1119.25,1065.25
  4-BOTTOM w15: Rled3.2@805,400 826,400 1019,593 1019,967 1092.19,1040.19 ; Upic.56@1119.25,1065.25 Upic.56
LED4: Rled4.2 Upic.57 | length 1177.8
  4-BOTTOM w12: 990,1129 1017,1156
  4-BOTTOM w15: Rled4.2@604,407 687,490 877,490 990,603 990,971 963,998 963,1102 990,1129 ; 1017,1156 1077,1156 1093.66,1139.34 Upic.57
LED5: Rled5.2 Upic.64 | length 1323.9
  4-BOTTOM w15: Rled5.2 427.09,397.09 Rled5.2@422.17,402 ; Rled5.2@420,413 441,413 557,529 879,529 956,606 956,963 903,1016 903,1214 922.66,1233.66 Upic.64
LED6: Rled6.2 Upic.65 | length 1416.4
  4-BOTTOM w15: Rled6.2@330,395 330,401 504,575 885,575 925,615 925,952 876,1001 876,1224 911.25,1259.25 Upic.65
MCLR: J3.1 pad.0@1229,1783 pad.0@1889,894 RsMclr.1 Upic.9 | length 1754.4
  2-SIGNAL w25: pad.0@1232,1782 1473,1782 1482,1773 1482,1147 1676,953 1855,953 pad.0@1897,911 ; 1898,913 1898,777 J3.1@1998,677
  4-BOTTOM w16: Upic.9 pad.0@1221.61,1784.39
  4-BOTTOM w50: J3.1@2003.09,682.91 J3.1@2004,682
NetCmclr_2: Cmclr.2 Rmclr.1 RsMclr.2 SW1.3 | length 259.6
  4-BOTTOM w50: Rmclr.1@1900,802 1999,802 2002.09,805.09 RsMclr.2 ; SW1.3@2000,801 SW1.3 ; RsMclr.2@2015.54,901.54 Cmclr.2
NetCq1_1: Cq1.1 Q.2 Upic.50 | length 340.5
  4-BOTTOM w12: Cq1.1@1190,793 Q.2
  4-BOTTOM w16: Q.2@1190,862 1194,862 1272.8,940.8 Upic.50
NetCq2_1: Cq2.1 Q.1 Upic.49 | length 336.6
  4-BOTTOM w12: Cq2.1@1380,799 1380,857 Q.1
  4-BOTTOM w16: Upic.49 1298.39,938.61 Q.1@1380,857
NetD1_1: D1.1 pad.0@1213,293 pad.1@1107,293 Rled1.1 | length 73.9
  4-BOTTOM w50: D1.1@1160,214 Rled1.1
NetD2_1: D2.1 pad.0@1034,292 pad.1@926,295 Rled2.1 | length 68.9
  4-BOTTOM w50: D2.1@980,214 Rled2.1
NetD3_1: D3.1 pad.0@842,292 pad.1@734,294 Rled3.1 | length 58.9
  4-BOTTOM w50: D3.1@790,219 Rled3.1
NetD4_1: D4.1 pad.0@651,296 pad.1@544,297 Rled4.1 | length 72.9
  4-BOTTOM w50: D4.1 Rled4.1
NetD5_1: D5.1 Rled5.1 | length 77
  4-BOTTOM w50: D5.1 Rled5.1@420,287
NetD6_1: D6.1 Rled6.1 | length 140.3
  4-BOTTOM w50: D6.1 240,190 306,256 Rled6.1@306,283
NetJ6_3: J6.3 Rsu1tx.1 Ru1tx.1 | length 226.7
  4-BOTTOM w50: J6.3 1540,722 1599,781 1599,794 1683,794 Rsu1tx.1@1686,791
NetJ6_4: J6.4 Rsu1rx.1 | length 119.8
  4-BOTTOM w50: J6.4 1590,521 Rsu1rx.1@1633,478
PAN2: Can2.2 pad.0@1490,1836 pad.0@1513,2638 Ran2.1 Upic.18 | length 947.8
  2-SIGNAL w25: pad.0@1492,1831 1497,1836 1497,2613 pad.0@1519,2635
  4-BOTTOM w16: Upic.18 1451.93,1796.93 Can2.2@1478,1823
PAN3: Can3.2 pad.0@1446,1922 pad.0@1448,2394 Ran3.1 Upic.17 | length 1190.7
  2-SIGNAL w25: pad.0@1446,2394 1448,1921 pad.0@1446,2394
  4-BOTTOM w16: Upic.17 Can3.2@1426.34,1896.34
  4-BOTTOM w25: pad.0@1446,2395 1450,2399 Ran3.1
PAN4_QEA: CqeA.2 pad.0@1402,1995 pad.0@1402,2640 RqeA.1 Upic.16 | length 933.8
  2-SIGNAL w25: pad.0@1402,1995 pad.0@1402,2640
  4-BOTTOM w16: Upic.16 CqeA.2@1400.75,1990
PAN5_QEB: CqeB.2 pad.0@1357,2078 pad.0@1358,2392 RqeB.1 Upic.15 | length 743.9
  2-SIGNAL w25: pad.0@1357,2075 pad.0@1357,2391
  4-BOTTOM w16: CqeB.2@1347,2058 1347,1969 1375.16,1940.84 Upic.15
  4-BOTTOM w25: RqeB.1 1335,2416 pad.0@1358,2393
PAN8: Can8.2 pad.0@1904,2637 pad.0@1943,1521 Ran8.1 Upic.27 | length 1511.5
  2-SIGNAL w25: pad.0@1907,2640 1900,2633 1900,1669 1946,1623 pad.0@1946,1519
  4-BOTTOM w15: Upic.27 1913.57,1489.57 Can8.2@1925,1501
PAN9: Can9.2 pad.0@1845,2392 pad.0@2218,1366 Ran9.1 Upic.28 | length 2031.8
  2-SIGNAL w25: pad.0@1845,2393 1845,1661 1891,1615 1891,1504 1990,1405 2174,1405 pad.0@2215,1364
  4-BOTTOM w12: Can9.2@2210,1387 Can9.2@2217,1380
  4-BOTTOM w15: Upic.28 1617.98,1463.98 1938,1464 2015,1387 Can9.2@2210,1387
  4-BOTTOM w25: pad.0@1847,2393 1850,2396 Ran9.1
PAN10: Can10.2 pad.0@1804,2637 pad.0@2138,1336 Ran10.1 Upic.29 | length 2125.3
  2-SIGNAL w25: pad.0@1800,2638 1800,1653 1858,1595 1858,1487 1982,1363 2090,1363 2117,1336 pad.0@2140,1336
  4-BOTTOM w12: 1625.39,1438.39 1625.77,1438
  4-BOTTOM w15: Upic.29 1625.39,1438.39 ; 1625.77,1438 1913,1438 1997,1354 Can10.2@2132,1354
PAN11: Can11.2 pad.0@1745,2393 pad.0@2059,1295 Ran11.1 Upic.30 | length 1861.6
  2-SIGNAL w25: pad.0@1743,2395 1743,1657 1823,1577 1823,1466 1964,1325 2033,1325 pad.0@2060,1298
  4-BOTTOM w12: 1632.8,1412.8 1633,1413 ; Can11.2@2037,1312 Can11.2@2051,1298
  4-BOTTOM w15: Upic.30 1632.8,1412.8 ; 1633,1413 1895,1413 1996,1312 Can11.2@2037,1312
  4-BOTTOM w20: pad.0@1742,2393 1755,2406 Ran11.1
PAN12: Can12.2 pad.0@1701,2638 pad.0@1979,1262 Ran12.1 Upic.33 | length 1946.1
  2-SIGNAL w25: pad.0@1696,2634 1701,2629 1701,1644 1790,1555 1790,1446 1974,1262 pad.0@1978,1262
  4-BOTTOM w12: Upic.33 1625.98,1336.02 1669,1293 1944,1293 1981,1256 Can12.2@1983,1256
PAN13: Can13.2 pad.0@1645,2391 pad.0@1900,1243 Ran13.1 Upic.34 | length 1737.9
  2-SIGNAL w25: pad.0@1644,2395 1644,1365 1731,1278 1880,1278 pad.0@1900,1258
  4-BOTTOM w12: Upic.34 1616.57,1310.43 1654,1273 1890,1273 1897,1266
  4-BOTTOM w20: pad.0@1644,2392 1650,2398 Ran13.1
PAN14: Can14.2 pad.0@1612,2636 pad.0@1822,1212 Ran14.1 Upic.35 | length 1839.3
  2-SIGNAL w25: pad.0@1596,2634 1596,1351 1717,1230 1778,1230 1796,1212 pad.0@1822,1212
  4-BOTTOM w12: Upic.35 1608.16,1284.84 1642,1251 1793,1251 Can14.2@1812,1232
PAN15: Can15.2 pad.0@1543,2393 pad.0@1742,1177 Ran15.1 Upic.36 | length 1589.6
  2-SIGNAL w25: pad.0@1545,2395 1545,1343 1711,1177 pad.0@1742,1177
  4-BOTTOM w12: Upic.36 1598.75,1259.25 1639,1219 1715,1219 Can15.2@1749,1185
  4-BOTTOM w20: pad.0@1542,2393 1550,2401 Ran15.1
PBT1: Cbt1.2 Rbt1.1 Upic.66 | length 347.5
  4-BOTTOM w15: Rbt1.1@727,1096 727,1103 772,1148 772,1205 796,1229 845,1229 900.84,1284.84 Upic.66
PBT2: Cbt2.2 Rbt2.1 Upic.67 | length 504
  4-BOTTOM w15: Rbt2.1@565,1111 609,1111 675,1177 675,1224 722,1271 854,1271 893.43,1310.43 Upic.67
PBT3: Cbt3.2 Rbt3.1 Upic.68 | length 749.7
  4-BOTTOM w12: 592,1307 859,1307 888.02,1336.02 Upic.68
  4-BOTTOM w15: Rbt3.1@263,1206 329,1272 557,1272 592,1307
PBT4: Cbt4.2 Rbt4.1 Upic.69 | length 496.4
  4-BOTTOM w12: Rbt4.1@483,1326 Rbt4.1@487,1326 ; 720,1347 727,1340 863,1340 884.61,1361.61 Upic.69
  4-BOTTOM w16: Rbt4.1@487,1326 508,1347 720,1347
PGC: J3.5 pad.0@2371,783 Upic.19 | length 2207.2
  2-SIGNAL w50: J3.5 2269,680 pad.0@2371,782
  4-BOTTOM w12: Upic.19 1477.52,1735.52 1526,1784 1600,1784 1642,1826
  4-BOTTOM w20: 1642,1826 2308,1826 2382,1752 pad.0@2382,780 ; J3.5 J3.5@2215,680
PGD: J3.4 Upic.20 | length 2361
  4-BOTTOM w12: Upic.20 1562.93,1761 1625,1761 1653,1789
  4-BOTTOM w20: 1653,1789 2272,1789 2341,1720 2341,819 2318,796 2318,534 2282,498 2188,498 2150,536 J3.4
  4-BOTTOM w50: J3.4 J3.4@2150,600
PRA14_INT3: Cint3.2 pad.0@505,2070 pad.0@1229,1011 Rint3.1 Upic.52 | length 1565.7
  2-SIGNAL w25: pad.0@511,2052 511,1586 608,1489 608,1408 873,1143 1126,1143 1233,1036 pad.0@1233,1007
  4-BOTTOM w12: pad.0@1221.61,1025.39 Upic.52
PRA15_INT4: Cint4.2 pad.0@415,2066 pad.0@1172,1002 Rint4.1 Upic.53 | length 1810.1
  2-SIGNAL w25: pad.0@416,2068 407,2059 407,1834 475,1766 475,1181 584,1072 1123,1072 1173,1022 pad.0@1173,999
  4-BOTTOM w12: pad.0@1173,1004 1196.02,1027.02 Upic.53
PRD0: Crd0.2 pad.0@416,1684 pad.0@830,1028 pad.0@1011,1020 Qrd0.1 Rrd0.1 Rrd0_o.1 Upic.58 | length 2717.8
  2-SIGNAL w25: pad.0@423,1679 433,1669 433,1155 560,1028 pad.0@1016,1028
  4-BOTTOM w12: 1030,1028 1068.07,1066.07 Upic.58
  4-BOTTOM w16: Qrd0.1@187,2929 146,2888 146,2841 42,2737 42,2130 422,1750 pad.0@422,1679
PRE8_INT1: Cint1.2 pad.0@1249,2391 pad.0@1253,2209 Rint1.1 Upic.13 | length 809.9
  2-SIGNAL w25: pad.0@1249,2205 pad.0@1249,2400
  4-BOTTOM w16: Cint1.2@1264,2233 1258,2227 1258,2055 1284,2029 1284,1954 1323.98,1914.02 Upic.13
  4-BOTTOM w25: Rint1.1 1235,2408 pad.0@1248,2395
PRE9_INT2: Cint2.2 pad.0@1279,2639 pad.0@1306,2154 Rint2.1 Upic.14 | length 934
  2-SIGNAL w25: pad.0@1277,2641 1278,2640 1278,2507 1305,2480 pad.0@1305,2157
  4-BOTTOM w16: 1312,2124 1312,1963 1349.57,1925.43 Upic.14
PU2TX: Rsu2tx.2 Upic.40 | length 178.8
  4-BOTTOM w16: Upic.40 1595,1123.07 1595,1060 Rsu2tx.2@1643,1012
PWM1H: J1.10 pad.0@699,2554 Upic.77 | length 1615.9
  4-BOTTOM w15: 701,2943 701,1697 831.66,1566.34 Upic.77
  4-BOTTOM w16: J1.10@660,2984 701,2943
PWM2H: J1.12 pad.0@804,2557 Upic.79 | length 1492.2
  4-BOTTOM w15: 802,2939 802,1701 885,1618 Upic.79@961,1618
  4-BOTTOM w16: J1.12@759,2982 802,2939
PWM3H: J1.14 pad.0@904,2557 Upic.1 | length 1349
  4-BOTTOM w16: J1.14@857,2984 902,2939 902,1841 1016.89,1726.11 Upic.1
PWM4H: J1.16 pad.0@1000,2557 Upic.3 | length 1328.7
  4-BOTTOM w16: J1.16@955,2983 1002,2936 1002,1825 1068.07,1758.93 Upic.3
RA14_INT3: J1.6 pad.0@513,2190 Rint3.2 Rtint3.1 | length 825.6
  4-BOTTOM w16: J1.6@455,2987 502,2940 502,2794
  4-BOTTOM w20: 502,2794 524,2772 Rint3.2@524,2190
RA15_INT4: J1.5 pad.0@428,2188 Rint4.2 Rtint4.1 | length 742.5
  4-BOTTOM w20: Rint4.2@427,2186 427,2356 486,2415 486,2761 452,2795 J1.5
RD0: J1.2 pad.0@86,2898 Qrd0.3 Rrd0.2 Rrd0_o.2 | length 212.1
  4-BOTTOM w25: Rrd0.2@111,2899 111,2956 145,2990 J1.2
RE0: J1.9 pad.0@650,2503 Upic.76 | length 1566
  4-BOTTOM w15: J1.9@650,2890 650,1698 807.25,1540.75 Upic.76
RE2: J1.11 pad.0@754,2502 Upic.78 | length 1441.9
  4-BOTTOM w15: J1.11@754,2890 754,1696 858.07,1591.93 Upic.78
RE4: J1.13 pad.0@853,2503 Upic.80 | length 1327.1
  4-BOTTOM w15: J1.13@852,2898 852,1702.22 911.11,1643.11 Upic.80
RE6: J1.15 pad.0@950,2501 Upic.2 | length 1236.1
  4-BOTTOM w16: J1.15@950,2899 950,1836 1042.48,1743.52 Upic.2
RE8_INT1: J1.21 pad.0@1232,2554 Rint1.2 Rtint1.1 | length 345.9
  4-BOTTOM w15: Rint1.2@1233,2552 J1.21@1233,2871
  4-BOTTOM w16: J1.21@1233,2871 J1.21
RE9_INT2: J1.22 pad.0@1283,2754 Rint2.2 Rtint2.1 | length 308
  1-TOP w50: Rtint2.1@1283,2700.91 pad.0@1283,2751 ; Rtint2.1 Rtint2.1@1287,2699.91
  4-BOTTOM w16: J1.22 1252,2986 1302,2936 1302,2757 Rint2.2@1303,2756
RG2_SCL: J1.7 pad.0@556,2801 pad.0@1326,1174 Rtscl.1 Upic.47 | length 2420.5
  2-SIGNAL w25: pad.0@554,2800 557,2797 557,1605 648,1514 648,1438 904,1182 1154,1182 1239,1097 1281,1097 1326,1142 pad.0@1326,1174
  4-BOTTOM w12: pad.0@1329,1164 1349.57,1143.43 Upic.47
  4-BOTTOM w20: pad.0@556,2801 J1.7@556,2877
RG3_SDA: J1.8 pad.0@604,2776 pad.0@1391,1170 Rtsda.1 Upic.46 | length 2488.7
  2-SIGNAL w25: pad.0@603,2774 603,1622 690,1535 690,1463 930,1223 1359,1223 1391,1191 pad.0@1391,1170
  4-BOTTOM w12: Upic.46 1375.16,1153.16 pad.0@1385,1163
  4-BOTTOM w16: J1.8 602,2940 pad.0@602,2772
RG6_SCK2: J1.17 pad.0@1044,2737 Upic.6 | length 1227.9
  4-BOTTOM w16: J1.17@1050,2889 1050,2726 1049,2725 1049,1834 1144.84,1738.16 Upic.6
RG7_SDI2: J1.18 pad.0@1100,2777 Upic.7 | length 1337.7
  4-BOTTOM w16: J1.18@1052,2989 1102,2939 1102,2733 1101,2732 1101,1821 1170.43,1751.57 Upic.7
RG8_SDO2: J1.19 pad.0@1145,2732 Upic.8 | length 1209.7
  4-BOTTOM w16: J1.19@1147,2892 1147,1815 1195,1767 ; Upic.8 1196.02,1765.98
RG9_SS2: J1.20 pad.0@1191,2777 pad.0@1247,1640 Upic.10 | length 1516
  2-SIGNAL w20: pad.0@1191,2777 1191,2658 1116,2583 1116,1769 pad.0@1245.5,1639.5
  4-BOTTOM w12: pad.0@1192,2783 pad.0@1201,2792 ; pad.0@1247.2,1639.2 Upic.10
  4-BOTTOM w16: J1.20 1202,2940 1202,2793 pad.0@1201,2792
U1RX: Cu1rx.2 pad.0@1478,992 pad.0@1767,796 Rsu1rx.2 Ru1rx.1 Upic.42 | length 831.5
  2-SIGNAL w25: pad.0@1478,992 1568,992 pad.0@1764.5,795.5
  4-BOTTOM w16: Cu1rx.2@1477.52,985.52 Upic.42
  4-BOTTOM w20: Rsu1rx.2@1735,488 1805,558 1805,609 1768,646 pad.0@1768,794
U1TX: Rsu1tx.2 Upic.41 | length 260.5
  4-BOTTOM w15: Upic.41 1503.11,1089.89 1565,1028 1565,987 Rsu1tx.2@1652,900
U2RX: Cu2rx.2 J1.35 pad.0@1661,1163 pad.0@1949,2560 Ru2rx.1 Upic.39 | length 2590.8
  2-SIGNAL w25: pad.0@1661,1163 1719,1105 2076,1105 2271,1300 2271,1407 2230,1448 2137,1448 1992,1593 1992,1643 1953,1682 pad.0@1953,2563
  4-BOTTOM w12: pad.0@1958,2559 J1.35@1958,2889
  4-BOTTOM w16: Upic.39 Cu2rx.2@1658,1182.48
U2TX: J1.36 pad.0@1756,1005 pad.0@2003,2699 Rsu2tx.1 Ru2tx.1 | length 2686.9
  2-SIGNAL w25: pad.0@1754,1009 1758,1009 1804,1055 2103,1055 2375,1327 2375,2500 2176,2699 pad.0@2005,2699
  4-BOTTOM w16: J1.36 2002,2940 pad.0@2002,2702
VCC: B1.1 Cin2.2 Cin.2 J1.40 Ureg.1 | length 906.7
  1-TOP w80: B1.1@2253,2433 2253,2169 Ureg.1@2269,2153
  4-BOTTOM w80: J1.40@2155,2989 2195,2989 2253,2931 B1.1@2253,2433
VDD: Cdcan1.2 Cdcan2.2 Cdpic1.1 Cdpic2.1 Cdpic3.1 Cdpic4.1 Cout2.2 Cout.2 J1.37 J3.2 J6.1 J6.2 pad.0@102,2581 pad.0@773,646 pad.0@782,1433 pad.0@1282,1884 pad.0@1341,1007 pad.0@1553,890 pad.0@1689,1565 pad.0@1786,1373 Rmclr.2 Rpbt1.2 Rpbt2.2 Rpbt3.2 Rpbt4.2 Rtan2.2 Rtan3.2 Rtan8.2 Rtan9.2 Rtan10.2 Rtan11.2 Rtan12.2 Rtan13.2 Rtan14.2 Rtan15.2 Rtint1.2 Rtint2.2 Rtint3.2 Rtint4.2 RtqeA.2 RtqeB.2 Rtscl.2 Rtsda.2 Ru1rx.2 Ru1tx.2 Ru2rx.2 Ru2tx.2 Rvref+.2 Ucan.3 Upic.12 Upic.25 Upic.32 Upic.48 Upic.71 Ureg.3 | length 12296.2
  1-TOP w50: pad.0@109,2575 111,2575 336,2350 508,2350 561,2297 1311,2297 1485,2123 1806,2123 1806,1755 1843.5,1717.5 pad.0@1690,1564 ; pad.0@785,1439 785,1621 878,1714 1842,1714 ; Rtint1.2@1227,2453 1935,2453 1945,2443 1945,2213 1991.46,2166.54 Ureg.3@2065,2166.54 ; Rtint2.2@1277,2814 Ru2tx.2@2017,2814 ; pad.0@1286,1880 1452.5,1713.5 ; pad.0@1332,1018 Rtsda.2@1382.5,1068.5 ; Rtsda.2@1402,1068 1477,1068 pad.0@1785,1376 ; 1498,1090 1569,1019 1569,906 pad.0@1555,892 ; pad.0@1787,1378 1839,1430 1839,1693 ; 1835,1734 1835,2124 ; 1852,2125 2033,2125 Ureg.3@2064,2156 ; 1950,2452.91 1963.91,2452.91 2074,2563 2074,2765 2060,2765 2060,2881 J1.37@2053,2888 ; Ru2tx.2@2017,2810 2062,2765
  2-SIGNAL w50: pad.0@771,640 831,580 J6.2 ; J6.2@1482,558 1561,479 1948.61,479 J3.2 ; J6.2@1490,598 1431,657 1431,690 1554,813 pad.0@1554,897
  4-BOTTOM w10: Cdpic4.1@1280,1875 1280,1855 1298.39,1836.61
  4-BOTTOM w12: Cdpic2.1@1323.98,1021.02 Cdpic2.1@1331,1014 ; Upic.32 1635.39,1361.61 1680,1317 1744,1317 1792.5,1365.5 Cdpic3.1@1792.5,1374.5 ; Upic.25 1667.75,1540.75 1686,1559 Rvref+.2@1686,1560
  4-BOTTOM w15: Cdpic1.1@774,1412 800,1438 873,1438 898.2,1412.8 Upic.71
  4-BOTTOM w16: Upic.12 1298.39,1836.61 ; Cdpic2.1@1323.98,1021.02 Upic.48
  4-BOTTOM w25: Cdcan2.2 317.46,2596.54 327,2587 Ucan.3 Ucan.3@327,2527
  4-BOTTOM w50: Cdcan1.2@99,2593 102.54,2596.54 Cdcan2.2 ; Rpbt3.2@175.17,723 773,723 pad.0@773,646 ; Rpbt1.2@775,718 Rpbt1.2@779.09,713.91 ; Ru1tx.2@1481,802 1481,745 1435,699 1435,656 J6.2@1482.91,608.09 ; Rmclr.2 1895,626 Ru1rx.2@1935,586 ; Ru1rx.2 2045,585 J3.2@2050,580
VREF+: Cvref1.2 Cvref2.2 Rvref+.1 Upic.24 | length 437.9
  4-BOTTOM w12: Upic.24 1596.34,1566.34 1664,1634 Cvref2.2@1822.09,1634 ; Rvref+.1@1822.09,1576 Cvref2.2@1822.09,1634 ; 1837.09,1633.91 Cvref2.2@1822.09,1634 ; Cvref1.2@1898,1633 Cvref2.2@1822.09,1634
VREF-: Rvref-.2 Upic.23 | length 240.9
  4-BOTTOM w12: Upic.23 1519.07,1591.93 1499,1612 1499,1639 1541,1681 Rvref-.2@1625,1681
pads on no net: BT1.2 BT1.4 BT2.2 BT2.4 BT3.2 BT3.4 BT4.2 BT4.4 J3.6 SW1.2 SW1.4 Ucan.5 Upic.4 Upic.5 Upic.21 Upic.22 Upic.37 Upic.38 Upic.43 Upic.44 Upic.45 Upic.59 Upic.60 Upic.61 Upic.62 Upic.63 Upic.74 Upic.75

## Polygon pours and split planes (outlines as drawn)
GND on 3-GND "3-GND" (solid, remove dead copper, pour order 1001): 0,3141 2400,3141 2400,0 0,0
GND on 4-BOTTOM "4-GND" (solid, remove dead copper, pour order 1003): 0,3142 2400,3142 2400,0 0,0
GND on 2-SIGNAL "2-GND" (solid, remove dead copper, pour order 1002): 0,3142 2400,3142 2400,0 0,0
GND on 1-TOP "1-GND" (solid, remove dead copper, pour order 1000): 0,3142 2400,3142 2400,0 0,0

## Keep-outs
Keep-Out Layer:
  the board outline again, w10

## Other copper
1-TOP:
  pour cut-out: 2115.25,2934 2188,2934 2188,2847 2115.25,2847
  pour cut-out: 1966.12,3144 1989.88,3144 1989.88,3006 1966.12,3006
  pour cut-out: 2009.25,2483 2147,2483 2147,2338 2009.25,2338
2-SIGNAL:
  pour cut-out: 2015.25,3033 2088,3033 2088,2946 2015.25,2946
3-GND:
  pour cut-out: 2015.25,3033 2088,3033 2088,2946 2015.25,2946
4-BOTTOM:
  pour cut-out: 439,2485.62 439.77,2702 40.25,2702 39,2721 272,2721 273,2771 447,2771.05 447,2485.62
  pour cut-out: 1526,1660.75 1526,1133.25 1504,1133.25 1504,1660.75
  pour cut-out: 989,1137.5 989,1665 1011,1665 1011,1137.5
  pour cut-out: 998.25,1152 1525.75,1152 1525.75,1130 998.25,1130
  pour cut-out: 997.25,1667 1524.75,1667 1524.75,1645 997.25,1645
  pour cut-out: 2015.25,3033 2088,3033 2088,2946 2015.25,2946

## Silkscreen, mask and mechanical layers (free items; w line width, h text height)
Top Overlay:
  lines w20: 1186,2022 1186,2253 ; 1419,2291 1444,2266 1878,2266 1900,2288
  text "RD0" at 41,2932 h40
  text "L" at 405,2793 h30 r90
  text "H" at 405,2734 h30 r90
  text "5V" at 2103,2728 h56.25 r90
  text "CAN" at 364,2679 h56.25 r90
  text "SCL" at 568,2665 h40 r90
  text "SS2" at 1209,2664 h30 r90
  text "SDI2" at 1112,2641 h30 r90
  text "SDA" at 632,2636 h40 r90
  text "2" at 1571,2631 h30 r90
  text "8" at 1961,2627 h30 r90
  text "12" at 1755,2619 h30 r90
  text "14" at 1662,2616 h30 r90
  text "10" at 1859,2614 h30 r90
  text "TX" at 2020,2607 h30 r90
  text "QEA" at 1464,2599 h30 r90
  text "SCK2" at 1059,2597 h30 r90
  text "IT2" at 1353,2597 h30 r90
  text "SDO2" at 1161,2589 h30 r90
  text "PWM2" at 817,2584 h30 r90
  text "PWM3" at 914,2584 h30 r90
  text "PWM4" at 1004,2584 h30 r90
  text "PWM1" at 712,2583 h30 r90
  text "I2C" at 524,2567 h40
  text "+" at 2339,2558 h56.25
  text "-" at 2009,2557 h56.25
  text "SPI" at 1046,2535 h40
  text "RE1" at 715,2448 h30 r90
  text "RE7" at 1016,2439 h30 r90
  text "RE3" at 818,2438 h30 r90
  text "RE5" at 916,2438 h30 r90
  text "RE6" at 969,2391 h30 r90
  text "RE4" at 868,2387 h30 r90
  text "RE2" at 768,2386 h30 r90
  text "RE0" at 666,2384 h30 r90
  text "U2RX" at 1942,2383 h40 r90
  text "9" at 1863,2340 h30 r90
  text "3" at 1464,2337 h30 r90
  text "11" at 1760,2327 h30 r90
  text "15" at 1561,2311 h30 r90
  text "13" at 1660,2311 h30 r90
  text "IT1" at 1263,2298 h30 r90
  text "Carte" at 602,2277 h120
  text "QEB" at 1374,2277 h30 r90
  text "......................" at 602,2229 h120
  text "AN#/RB#" at 1537,2190 h40
  text ".                        ." at 602,2177 h120
  text ".                        ." at 602,2131 h120
  text ".                        ." at 602,2083 h120
  text "......................" at 602,2032 h120
  text "DsPIC" at 1458,1996 h56.25
  text "Nirgal" at 605,1920 h120
  text "30F" at 1542,1898 h56.25
  text "INT4" at 448,1884 h40 r90
  text "INT3" at 526,1882 h40 r90
  text "ROBOT ESEO" at 605,1801 h120
  text "6010A" at 1556,1795 h56.25
  text "7805" at 2032,1770 h56.25 r90
  text "2012" at 605,1700 h120
  text "RG3" at 1446,1230 h40 r90
  text "RG2" at 1343,1200 h40 r90
  text "U2RX" at 1533,1194 h40
  text "RD7" at 413,1134 h40
  text "RA15" at 1175,1119 h40 r90
  text "RA14" at 1232,1118 h40 r90
  text "RESET" at 1932,1035 h56.25
  text "ICD" at 2369,819 h56.25 r90
  text "UART" at 1532,760 h56.25
  text "Qz_10MHz" at 1059,724 h30
  text "RD5" at 419,581 h40
  text "RD6" at 119,580 h40
  text "RD4" at 722,567 h40
  text "RUN" at 1189,332 h56.25 r90
  text "USER" at 628,330 h56.25 r90
  text "CAN" at 1003,328 h56.25 r90
  text "UART" at 817,325 h56.25 r90
  text "USER" at 449,319 h56.25 r90
  text "ERROR" at 340,255 h56.25 r90
  text "R" at 290,86 h30
  text "V" at 1213,86 h30
  text "J" at 463,83 h30
  text "J" at 840,82 h30
  text "O" at 1015,82 h30
  text "V" at 645,79 h30
  text "RD13" at 163,20 h40
  text "RD12" at 348,20 h40
  text "RD10" at 716,19 h40
  text "RD11" at 537,18 h40
  text "RD9" at 917,18 h40
  text "RD8" at 1111,18 h40
Bottom Overlay:
  text "MCP2551" at 529,2694 h40 r90
  text "10u" at 2247,2670 h30
  text "100n" at 213,2559 h40 r90
  text "1u" at 115,2533 h40 r90
  text "10n" at 2382,2509 h30
  text "10k" at 1142,2139 h40 r90
  text "100n" at 1136,1947 h30
  text "100n" at 1893,1918 h40 r90
  text "10n" at 1814,1874 h40 r90
  text "100n" at 1150,1869 h30
  text "10R" at 1724,1759 h40
  text "1n" at 2025,1587 h40 r90
  text "10k" at 1846,1508 h40 r270
  text "100n" at 633,1440 h30 r90
  text "100n" at 1796,1412 h30
  text "100R" at 427,1394 h40 r90
  text "dsPIC" at 1481,1352 h40 r90
  text "100n" at 573,1351 h30 r90
  text "100n" at 853,1320 h30
  text "100n" at 680,1274 h30 r90
  text "100n" at 895,1223 h30 r90
  text "100R" at 218,1212 h40 r90
  text "100R" at 498,1115 h40 r90
  text "100R" at 646,1100 h40 r90
  text "100" at 1830,1057 h40 r90
  text "100n" at 885,1053 h30 r90
  text "10n" at 1561,1019 h40 r90
  text "100n" at 1404,940 h30
  text "100R" at 1961,934 h40
  text "100k" at 125,850 h40 r90
  text "10k" at 1627,848 h40
  text "100k" at 280,846 h40 r90
  text "100k" at 429,844 h40 r90
  text "100k" at 714,837 h40 r90
  text "100" at 1727,829 h30 r270
  text "22p" at 1317,732 h30 r180
  text "22p" at 1175,730 h30 r180
  text "10k" at 1835,536 h40 r180
  text "10k" at 1605,429 h40 r180
  text "1k" at 1110,361 h30 r90
  text "1k" at 189,357 h30 r90
  text "1k" at 925,356 h30 r90
  text "1k" at 544,353 h30 r90
  text "1k" at 740,351 h30 r90
  text "1k" at 269,329 h30 r90
Mechanical 2:
  text ".Hole_Count" at -1074,3063 h60
  text ".Via_Count" at -2297,3052 h60

## Dimensions
135,1635 to -2.5,0 on Mechanical 15
-2.5,0 to 140,405 on Mechanical 15
135,1635 to 140,405 on Mechanical 15
140,405 to 0,-2.5 on Mechanical 15
140,405 to -243,718 on Mechanical 15
-2.5,3149 to 2400,-2.5 on Mechanical 15
-2.5,0 to 2402.5,0 on Mechanical 15